# EAGLE board RTK_mosaic-X5-Panel (EAGLE 9.6.2), part 1 of 2
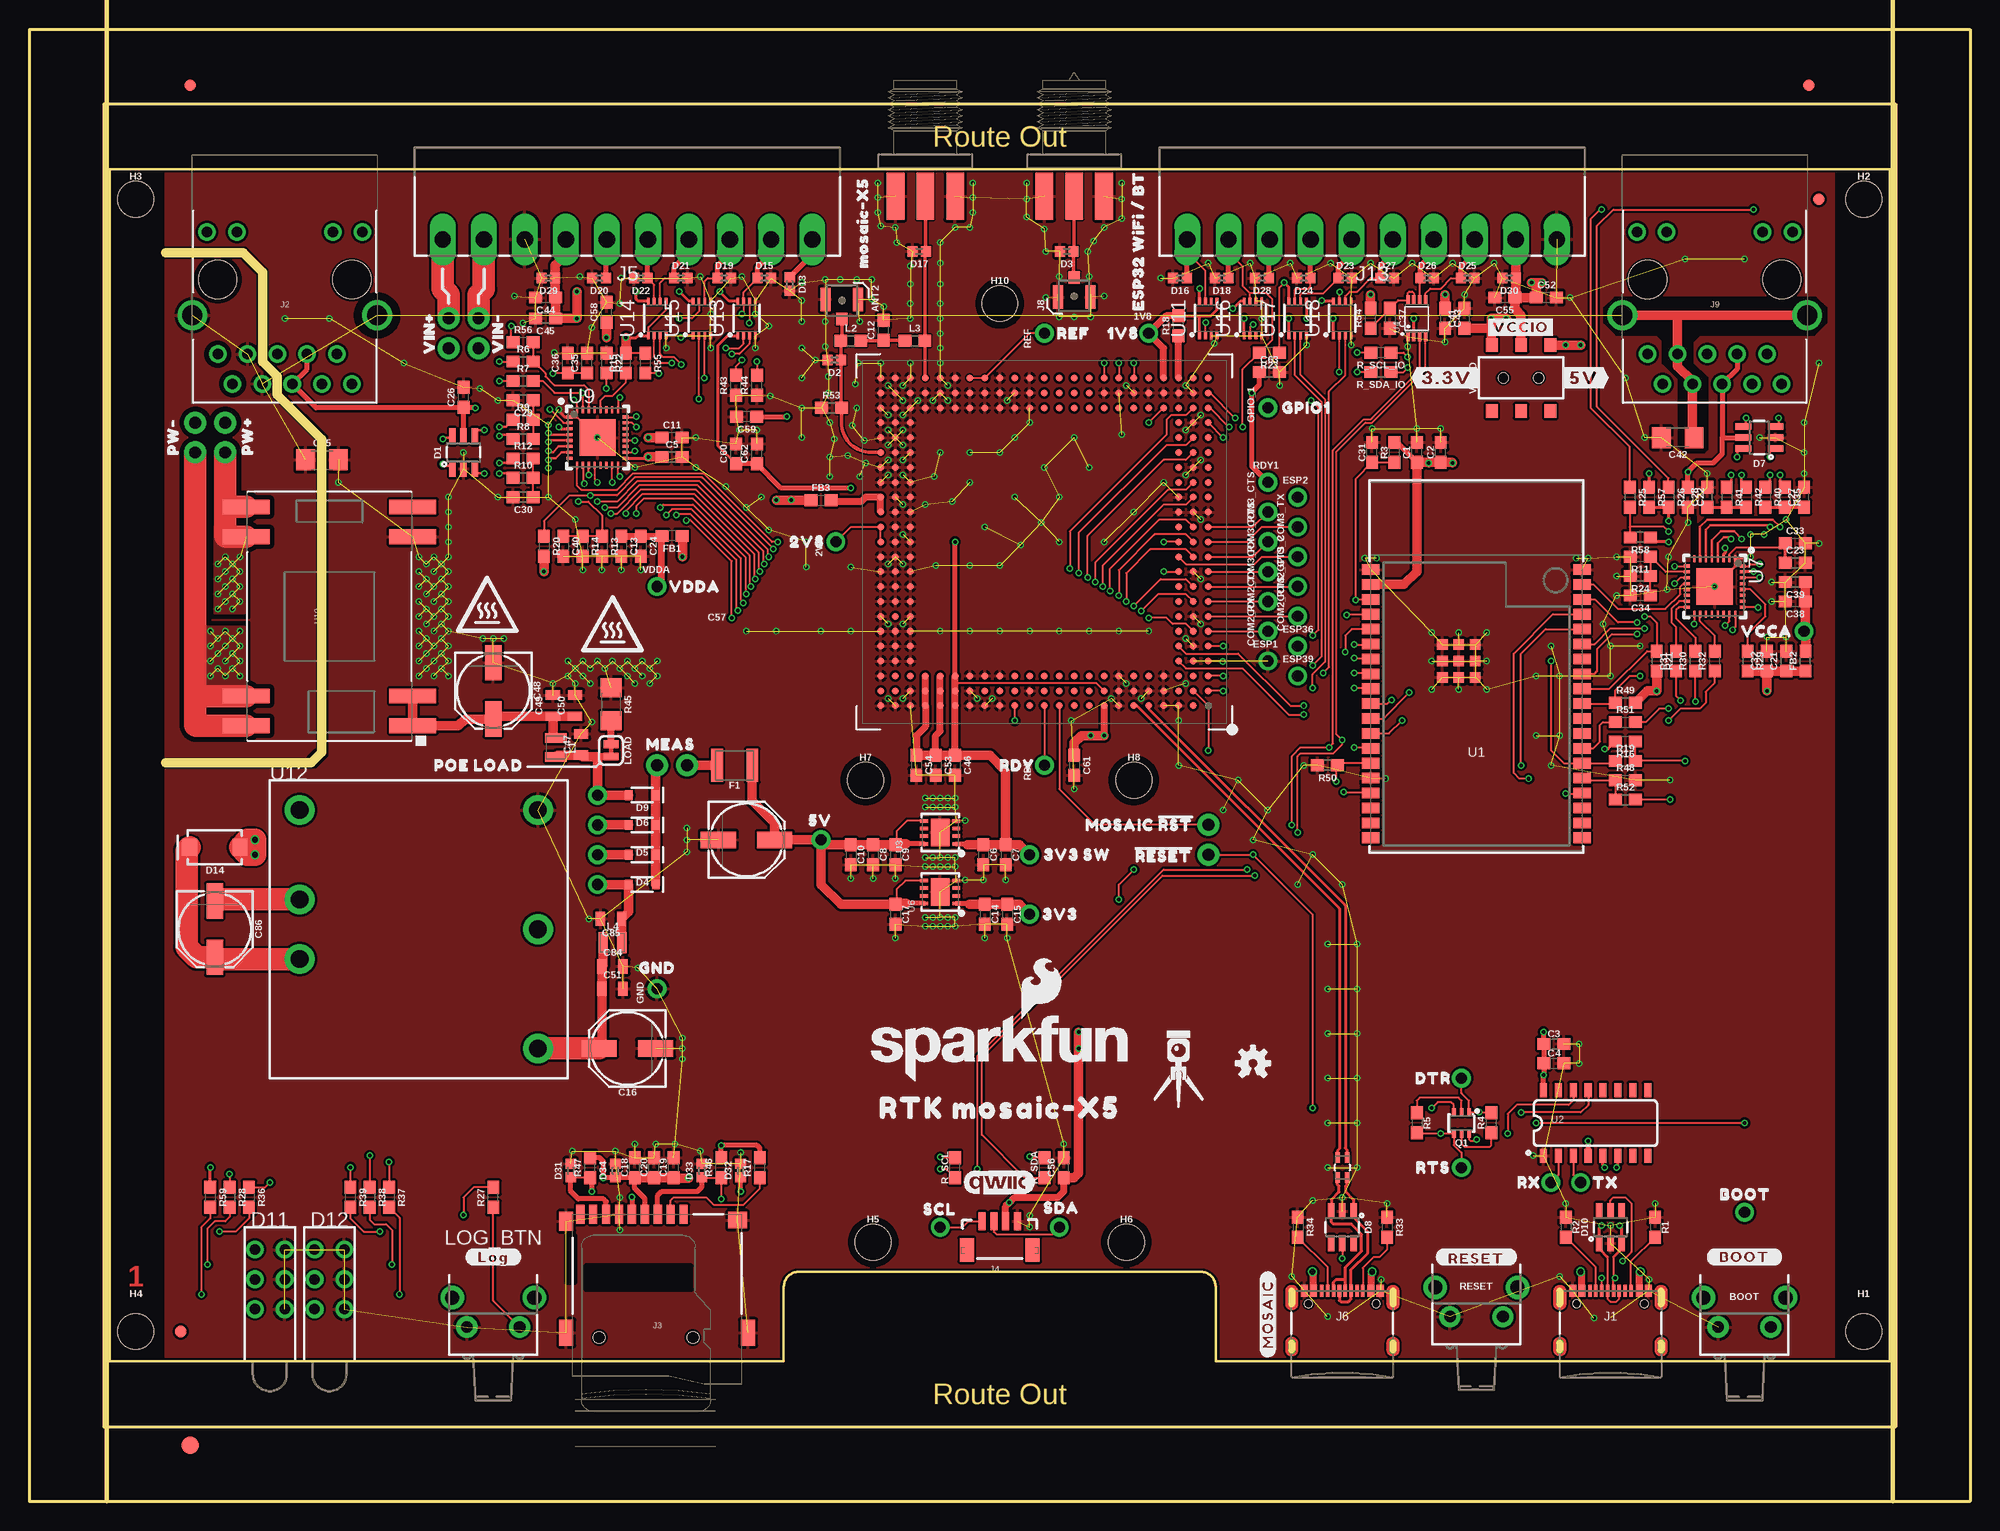
[diagram p0: board, top side]
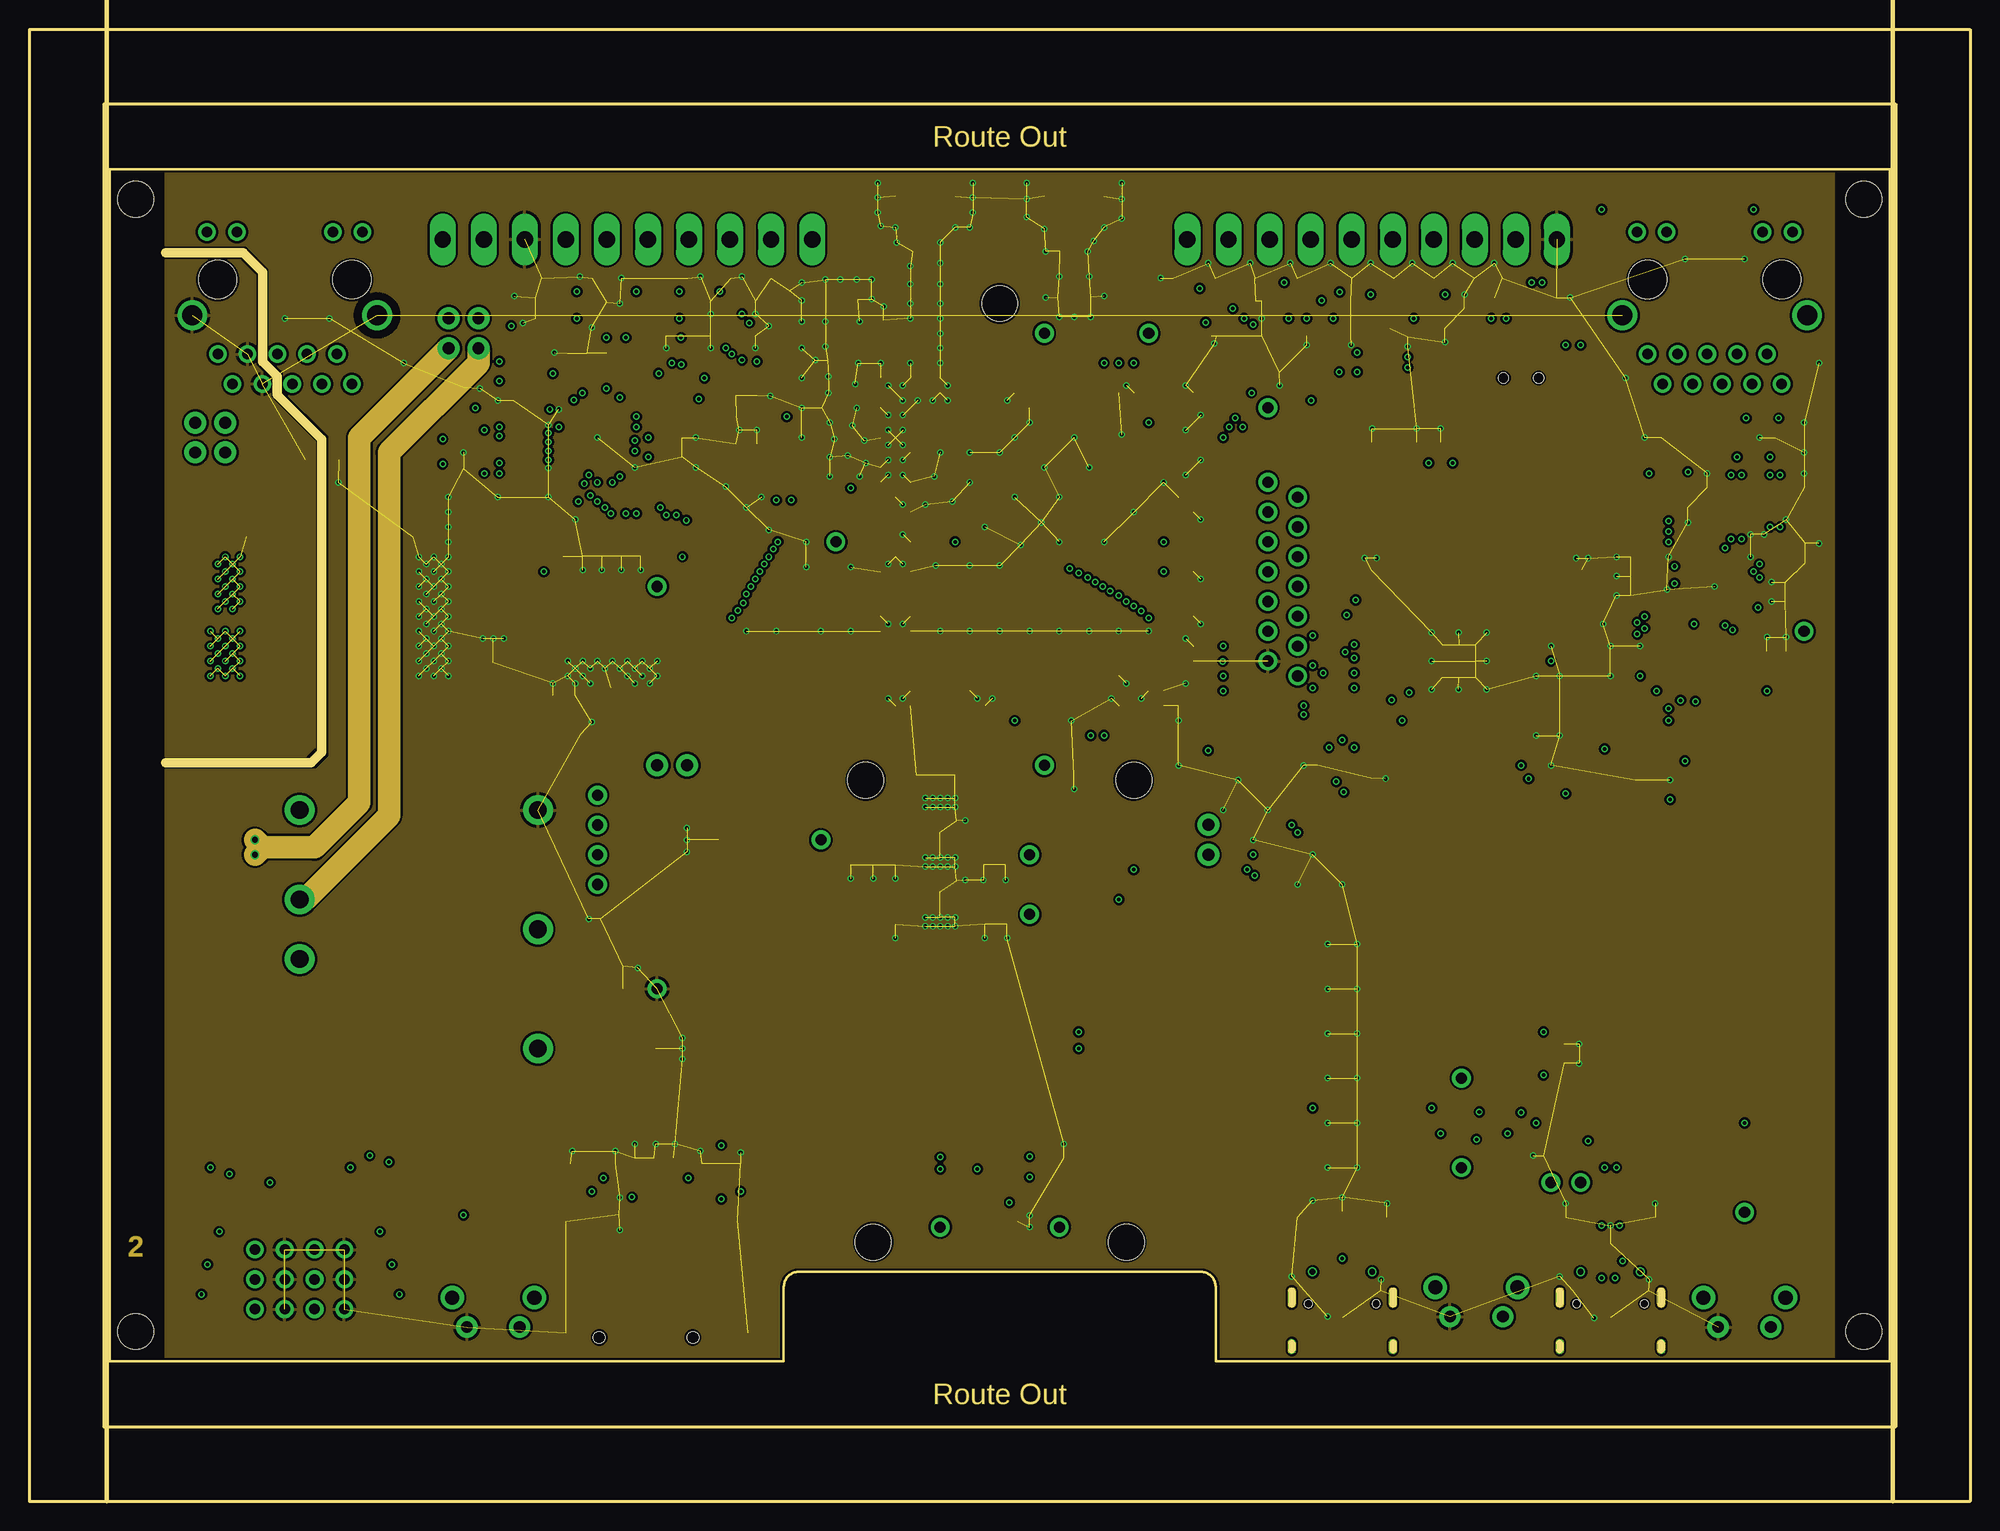
[diagram p1: board, inner layer Route2]
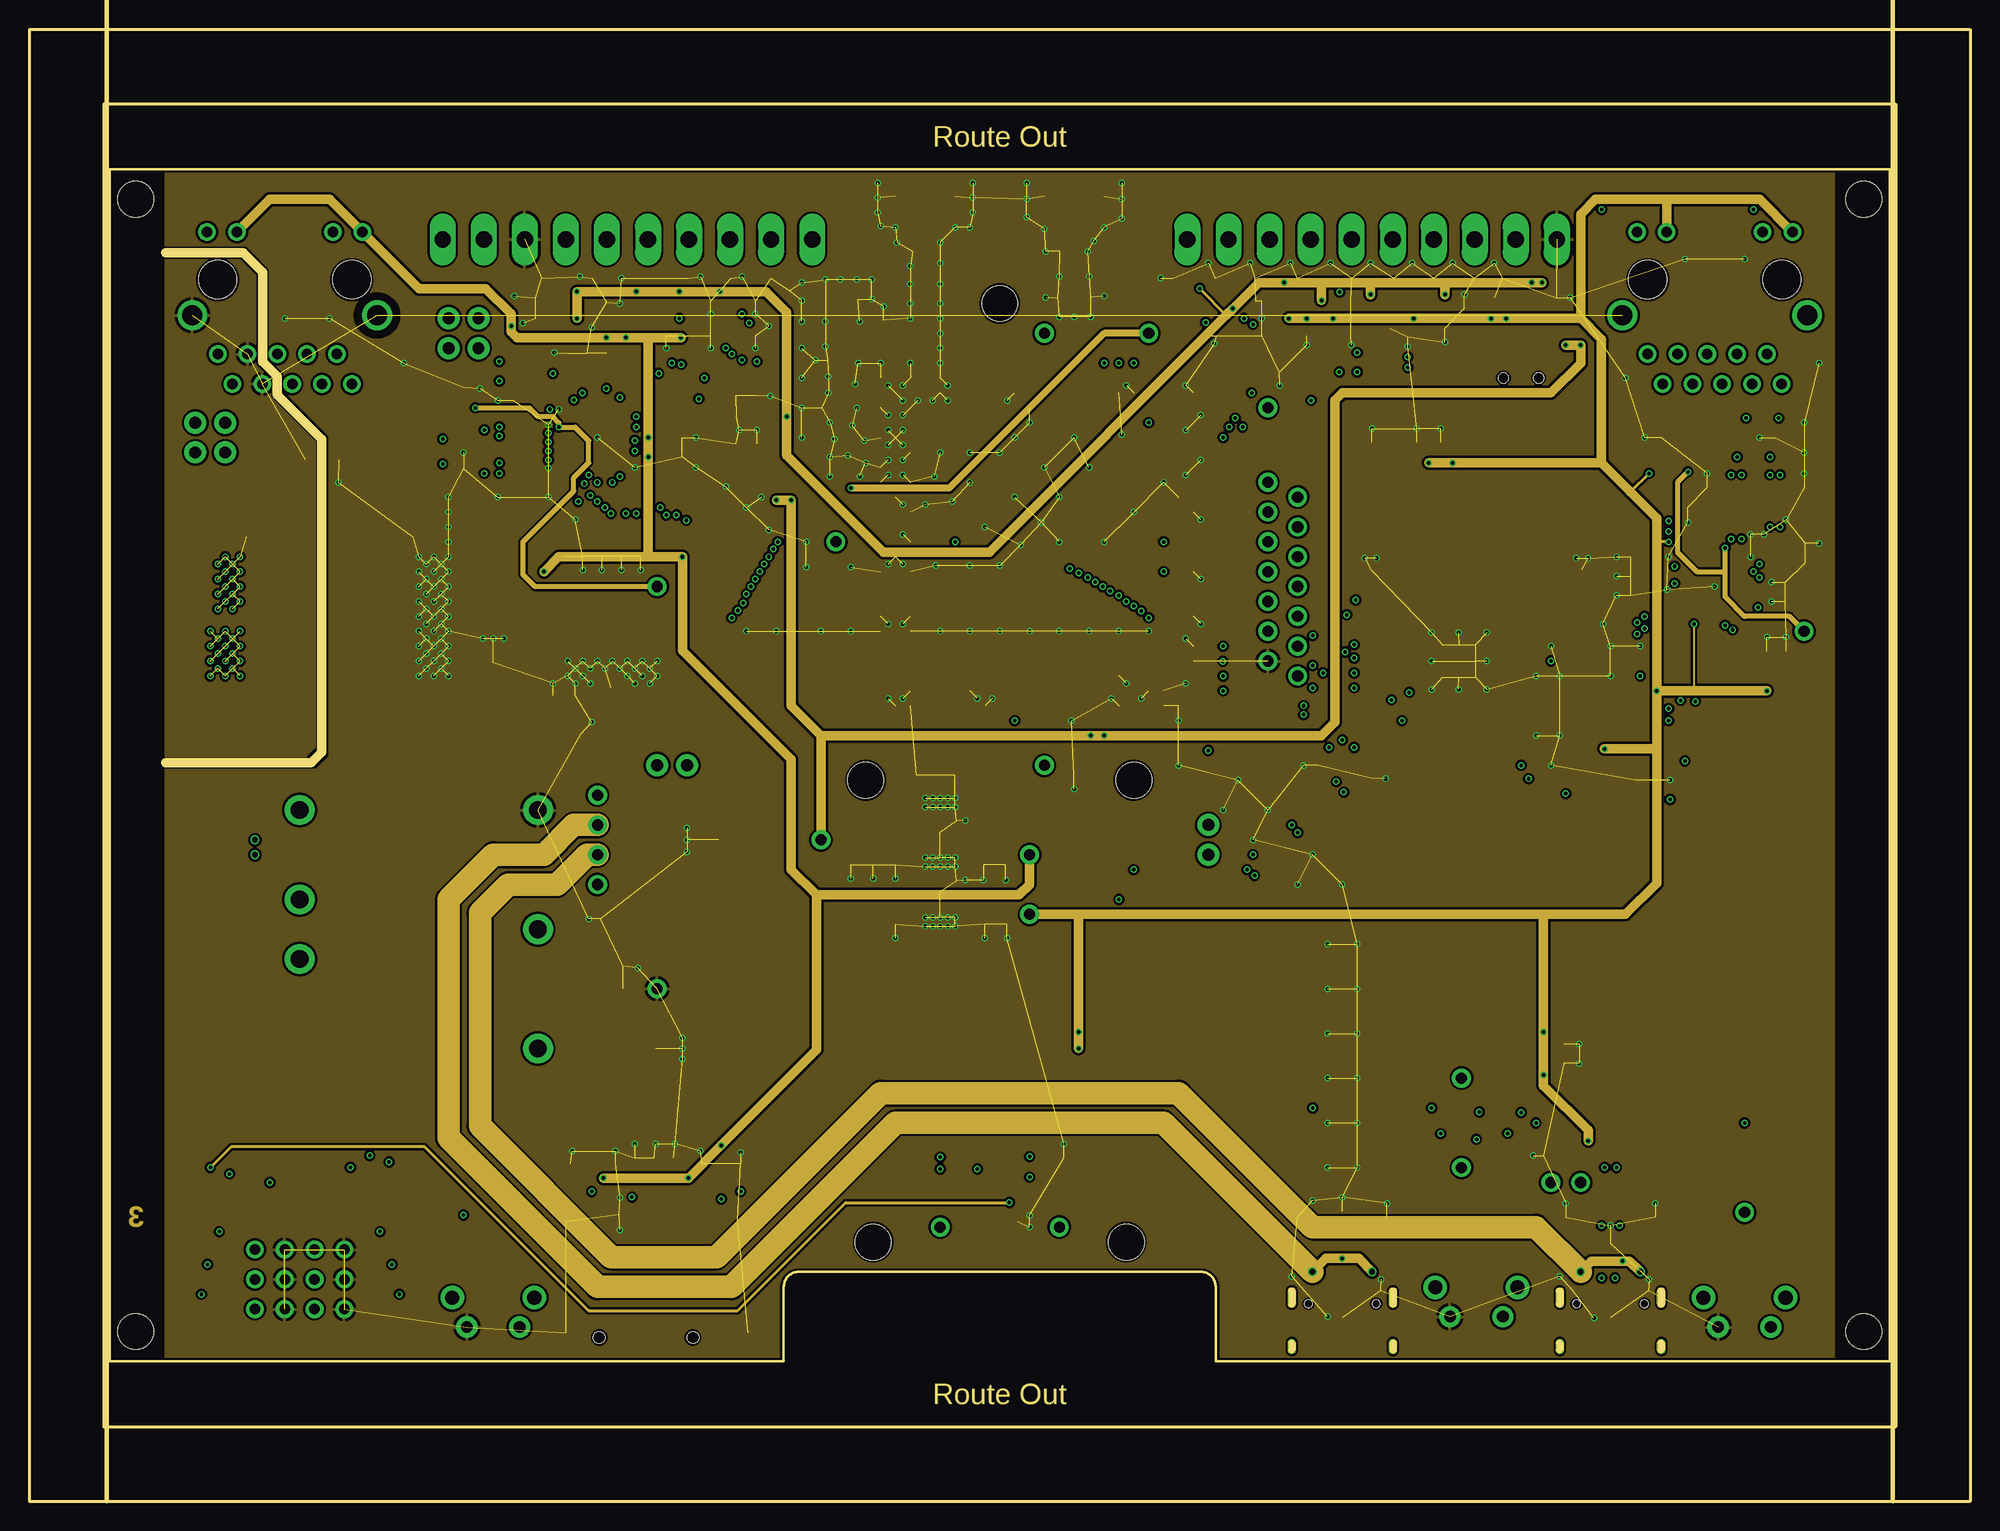
[diagram p2: board, inner layer Route15]
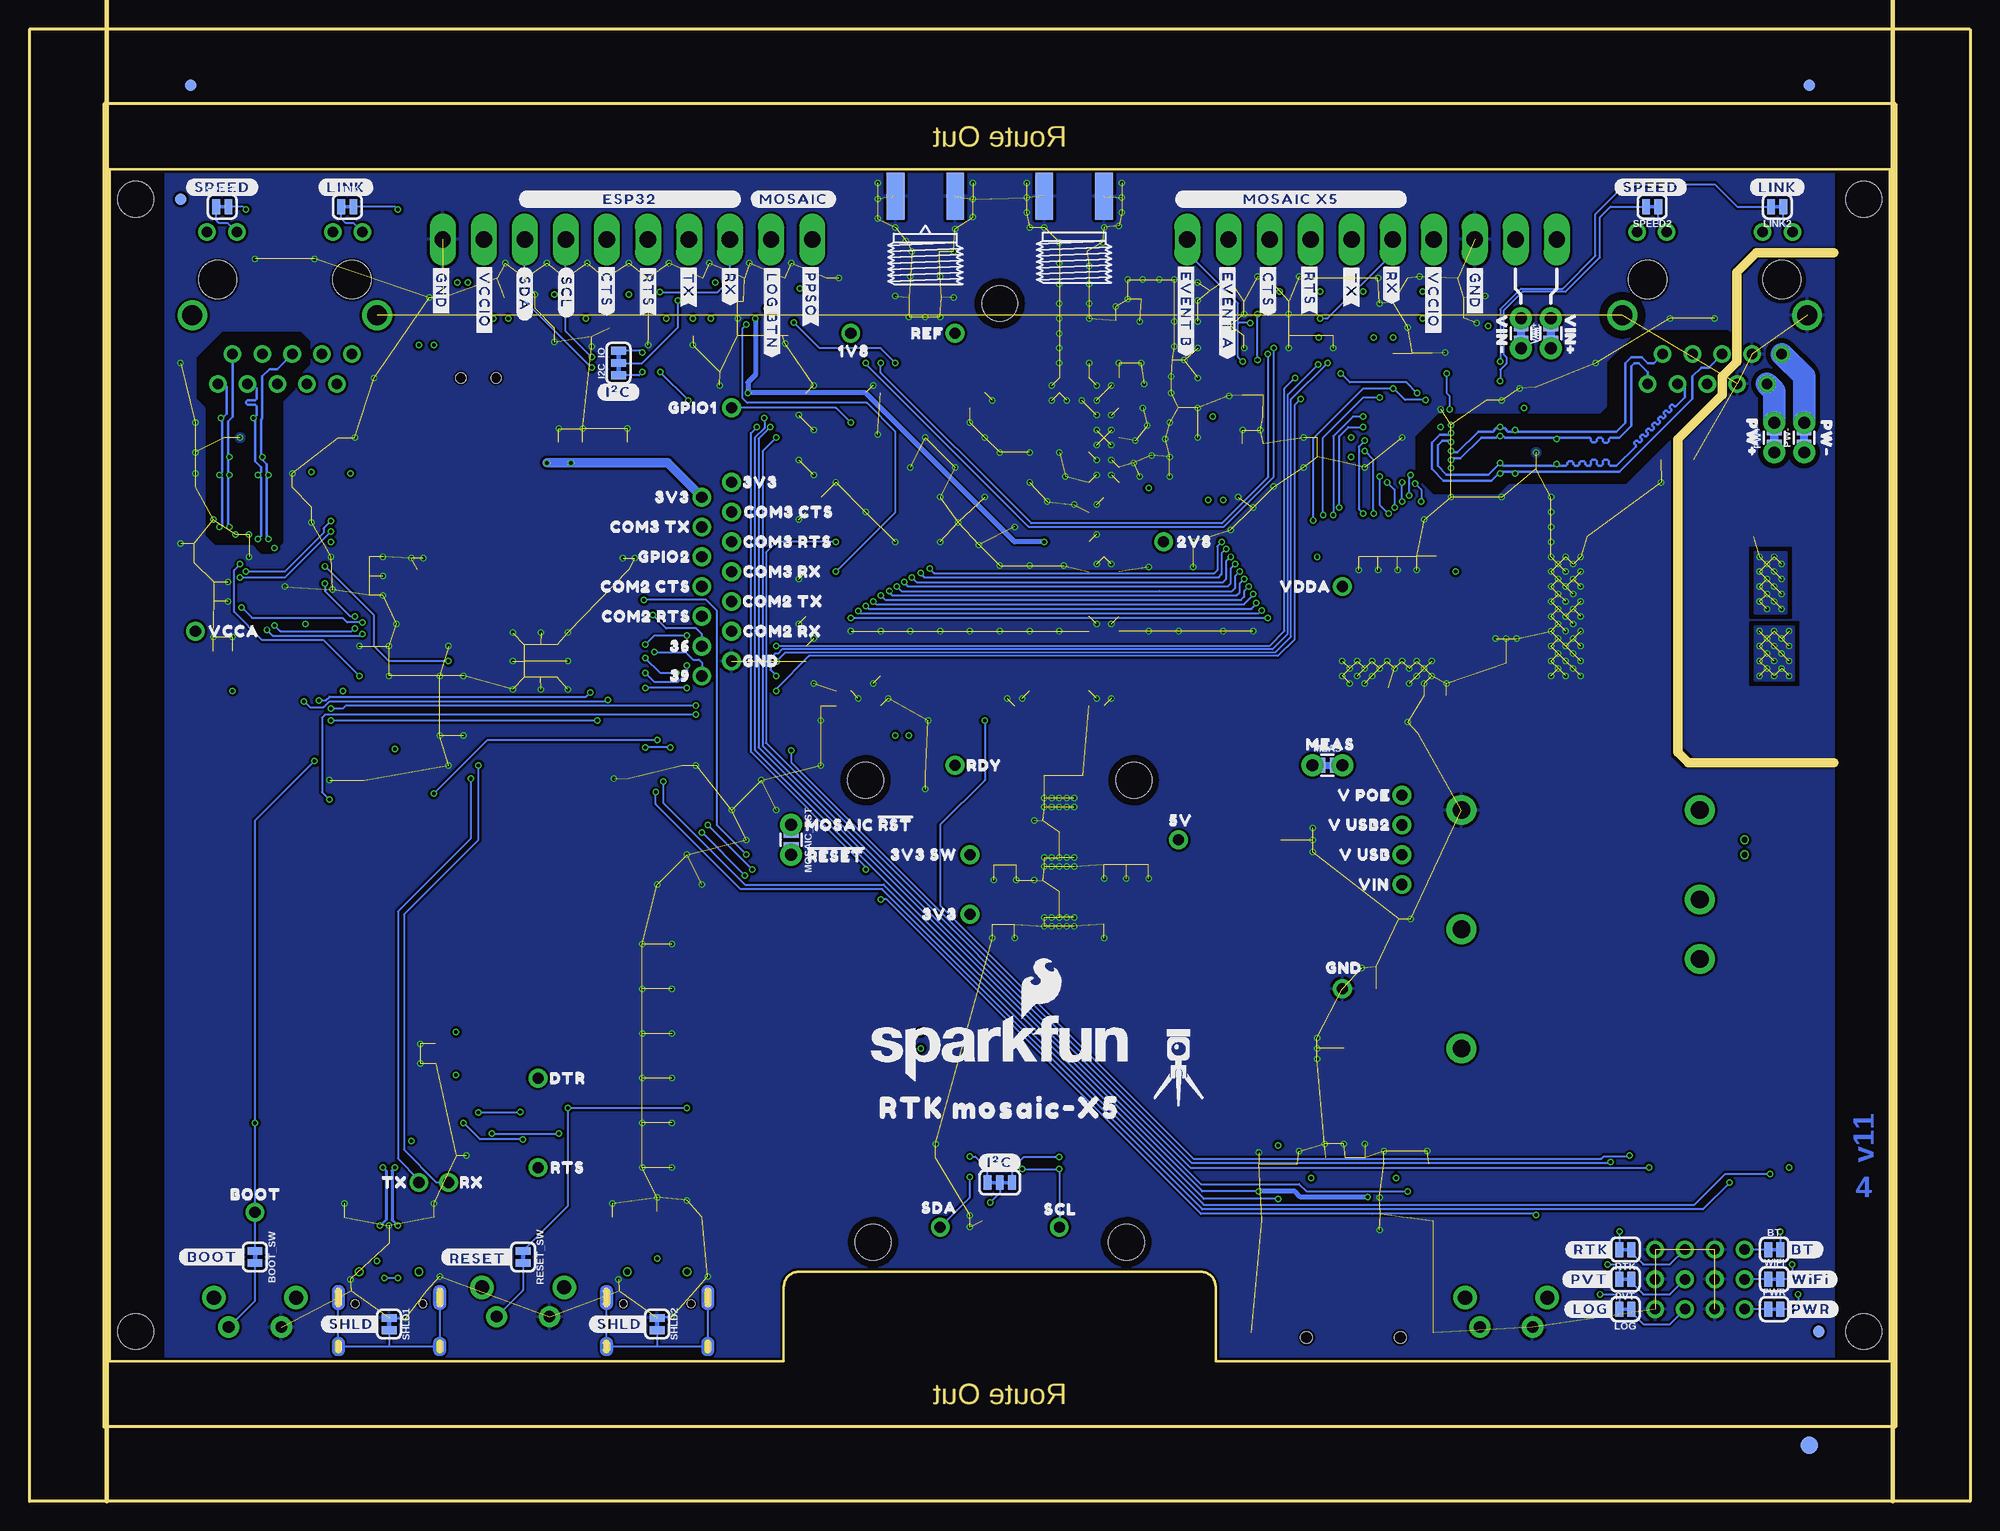
[diagram p3: board, bottom side, seen from below]

Size 165.48 x 125.48 mm. Coordinates in mm from the lower left corner, seen from the top.
Outline: 6.86,11.94 64.33,11.94 64.33,18.29 arc-90 65.59,19.56 99.89,19.56 arc-90 101.16,18.29 101.16,11.94 158.62,11.94 158.62,113.54 6.86,113.54 6.86,11.94
Outline: 0,0 165.48,0 165.48,125.48 0,125.48 0,0
Outline: 6.35,6.35 159.13,6.35 159.13,119.13 6.35,119.13 6.35,6.35
Copper layers (1*2*15*16): Top 0.035559375mm / dielectric 0.47751875mm / Route2 0.035559375mm / dielectric 0.47751875mm / Route15 0.035559375mm / dielectric 0.47751875mm / Bottom 0.035559375mm
Design rules "RTK_mosaic-X5": minimum track width 5mil, minimum drill 0.2mm, track to track 5mil, track to pad 5mil, pad to pad 5mil, via to via 5mil, smd to smd 5mil, copper to edge 7mil, drill to drill 7mil, minimum pad ring 5mil, minimum via ring 5mil, stop-mask expansion 2.5mil, vias tented up to drill 25mil, thermal gap 10mil
tKeepout: area 6.9,18.3 to 11.6,107.2; area 153.9,18.3 to 158.6,107.2
tRestrict: 19 lines
bRestrict: 41 lines
Milling: 11 lines

## Footprints (pad centres in the part's own frame; a part is rotated, then mirrored left to right if it is on the bottom)
1X01_NO_SILK = drill 0.95 pad 1.6: 1 0,0
SMA-EDGE = smd 1.5 x 4: GND@0 -2.54,0; GND@1 2.54,0; SIG 0,0 | smd 1.5 x 4 bottom: GND@2 -2.54,0; GND@3 2.54,0
U.FL_REDUCED_FOOTPRINT__NO_CREAM = smd 2 x 0.85: 1 -0.1,1.375; 2 -0.1,-1.375 | smd 1.05 x 1: FEED 1.575,0
TACTILE_SWITCH_PTH_RA_8-020 = drill 1 pad 1.8: 1 -2.25,0; 2 2.25,0 | drill 1.2 pad 2: M1 -3.5,2.5; M2 3.5,2.5
SMT-JUMPER_2_NC_TRACE_SILK = smd 0.66 x 1.27: 1 -0.521,0; 2 0.521,0
0603 = smd 1.1 x 1: 1 -0.85,0; 2 0.85,0
0603_NO_CREAM = smd 1.1 x 1: 1 -0.85,0; 2 0.85,0
PANASONIC_D = smd 3 x 1.4: + 2.4,0; - -2.4,0
1206 = smd 1.6 x 1.8: 1 -1.4,0; 2 1.4,0
0805 = smd 0.8 x 1.2: 1 -0.9,0; 2 0.9,0
SOT-23-6 = smd 0.55 x 1.35: 1 -0.95,-1.375; 2 0,-1.375; 3 0.95,-1.375; 4 0.95,1.375; 5 0,1.375; 6 -0.95,1.375
0402 = smd 0.85 x 0.9: 1 -0.58,0; 2 0.58,0
SOD-323 = smd 0.63 x 0.83: A 1.15,0; C -1.15,0
CBI_LED_T-3MM_PTH = drill 0.889 pad 1.524: ANODE_1 -1.27,9.525; ANODE_2 -1.27,6.985; ANODE_3 -1.27,4.445; CATHODE_1 1.27,9.525; CATHODE_2 1.27,6.985; CATHODE_3 1.27,4.445
SMA-DIODE = smd 1.27 x 1.47: A -2.15,0; C 2.15,0
FIDUCIAL-1X2 = smd 1 x 1: 1 0,0
FIDUCIAL-1.5X3 = smd 1.5 x 1.5: 1 0,0
RP-SMA-EDGE = smd 1.5 x 4: GND@0 -2.54,0; GND@1 2.54,0; SIG 0,0 | smd 1.5 x 4 bottom: GND@2 -2.54,0; GND@3 2.54,0
1210 = smd 1 x 2.8: 1 -1.5,0; 2 1.5,0
STAND-OFF-TIGHT = hole 3.048: 0,0
SMT-JUMPER_3_2-NC_TRACE_SILK = smd 0.66 x 1.27: 1 -1.041,0; 2 0,0; 3 1.041,0
USB-C-16P_4LAYER-PADS = smd 0.3 x 1: A5 -1.25,-0.34; A6 -0.25,-0.34; A7 0.25,-0.34; A8 1.25,-0.34; B5 1.75,-0.34; B6 0.75,-0.34; B7 -0.75,-0.34; B8 -1.75,-0.34 | smd 0.6 x 1: GND -3.225,-0.34; GND2 3.225,-0.34; VBUS1 -2.45,-0.34; VBUS2 2.45,-0.34 | drill 0.4 pad 0.6 long: SHLD1 -4.318,-0.915; SHLD2 4.318,-0.915; SHLD3 -4.318,-5.095; SHLD4 4.318,-5.095 | hole 0.65: -2.89,-1.445; 2.89,-1.445
MAGJACK-SYM_LED = drill 0.9 pad 1.5: 1 -5.715,8.89; 2 -4.445,6.35; 3 -3.175,8.89; 4 -1.905,6.35; 5 -0.635,8.89; 6 0.635,6.35; 7 1.905,8.89; 8 3.175,6.35; 9 4.445,8.89; 10 5.715,6.35; 11 -6.63,-4.06; 12 -4.09,-4.06; 13 4.09,-4.06; 14 6.63,-4.06 | drill 1.7 pad 2.4: S1 -7.875,3.05; S2 7.875,3.05 | hole 3.25: -5.715,0; 5.715,0
MICROSD-EXTERNALPIN = smd 0.7 x 1.6: 1 2.25,10.5; 2 1.15,10.5; 3 0.05,10.5; 4 -1.05,10.5; 5 -2.15,10.5; 6 -3.25,10.5; 7 -4.35,10.5; 8 -5.45,10.5; 9 -6.55,10.5 | smd 1.2 x 1.6: 10 -7.75,9.9 | smd 1.2 x 2.2: 11 -7.75,0.4; 12 7.75,0.4 | smd 1.6 x 1.4: 13 6.85,10 | hole 1: 3.05,0; -4.95,0
JST04_1MM_VERT = smd 0.6 x 1.55: 1 -1.5,0.775; 2 -0.5,0.775; 3 0.5,0.775; 4 1.5,0.775 | smd 1.2 x 2: NC1 -2.8,3.2; NC2 2.8,3.2
1X10_SCREW_TERMINAL_3.5MM = drill 1.4 pad 2.2 long: 1 -15.75,2.8; 2 -12.25,2.8; 3 -8.75,2.8; 4 -5.25,2.8; 5 -1.75,2.8; 6 1.75,2.8; 7 5.25,2.8; 8 8.75,2.8; 9 12.25,2.8; 10 15.75,2.8
U.FL_REDUCED_FOOTPRINT = smd 2 x 0.85: 1 -0.1,1.375; 2 -0.1,-1.375 | smd 1.05 x 1: FEED 1.575,0
0805-WIDE = smd 0.8 x 1.8: 1 -0.8,0; 2 0.8,0
0603_NO-CREAM = smd 1.1 x 1: 1 -0.85,0; 2 0.85,0
COMBO-JUMPER_2_NC_TRACE = smd 0.635 x 1.27: 1 -0.508,0; 2 0.508,0 | drill 1.016 pad 1.88: 3 -1.27,0; 4 1.27,0
COMBO-JUMPER_2_NO = smd 0.635 x 1.27: 1 -0.508,0; 2 0.508,0 | drill 1.016 pad 1.88: 3 -1.27,0; 4 1.27,0
SC70-6 = smd 0.3 x 0.66: 1 -0.65,-0.92; 2 0,-0.92; 3 0.65,-0.92; 4 0.65,0.92; 5 0,0.92; 6 -0.65,0.92
RFCMF1220100M4T = smd 0.9 x 0.4: A1 -0.85,0.4; A2 0.85,0.4; B1 -0.85,-0.4; B2 0.85,-0.4
ESP32-WROVER-E/IE = smd 0.9 x 1.5: 1 7.8,9; 2 6.53,9; 3 5.26,9; 4 3.99,9; 5 2.72,9; 6 1.45,9; 7 0.18,9; 8 -1.09,9; 9 -2.36,9; 10 -3.63,9; 11 -4.9,9; 12 -6.17,9; 13 -7.44,9; 14 -8.71,9; 15 -9.98,9; 16 -11.25,9; 17 -12.52,9; 18 -13.79,9; 19 -15.06,9; 20 -15.06,-9; 21 -13.79,-9; 22 -12.52,-9; 23 -11.25,-9; 24 -9.98,-9; 25 -8.71,-9; 26 -7.44,-9; 27 -6.17,-9; 28 -4.9,-9; 29 -3.63,-9; 30 -2.36,-9; 31 -1.09,-9; 32 0.18,-9; 33 1.45,-9; 34 2.72,-9; 35 3.99,-9; 36 5.26,-9; 37 6.53,-9; 38 7.8,-9 | smd 0.9 x 0.9: GND 0,1.5; GNDT1 -1.4,2.9; GNDT2 -1.4,1.5; GNDT3 -1.4,0.1; GNDT4 0,0.1; GNDT5 1.4,0.1; GNDT6 1.4,1.5; GNDT7 1.4,2.9; GNDT8 0,2.9
SO016 = smd 0.6 x 1.2: 1 -4.445,-2.8; 2 -3.175,-2.8; 3 -1.905,-2.8; 4 -0.635,-2.8; 5 0.635,-2.8; 6 1.905,-2.8; 7 3.175,-2.8; 8 4.445,-2.8; 9 4.445,2.8; 10 3.175,2.8; 11 1.905,2.8; 12 0.635,2.8; 13 -0.635,2.8; 14 -1.905,2.8; 15 -3.175,2.8; 16 -4.445,2.8
UDFN-8 = smd 0.3 x 0.65: 1 -0.975,-1.375; 2 -0.325,-1.375; 3 0.325,-1.375; 4 0.975,-1.375; 5 0.975,1.375; 6 0.325,1.375; 7 -0.325,1.375; 8 -0.975,1.375 | smd 2.35 x 1.6: EP 0,0
VSSOP_8PIN = smd 0.8 x 0.3: P1 -1.55,0.75; P2 -1.55,0.25; P3 -1.55,-0.25; P4 -1.55,-0.75; P5 1.55,-0.75; P6 1.55,-0.25; P7 1.55,0.25; P8 1.55,0.75
MLF55Q-32LD = smd 0.55 x 0.23: 1 -2.375,1.75; 2 -2.375,1.25; 3 -2.375,0.75; 4 -2.375,0.25; 5 -2.375,-0.25; 6 -2.375,-0.75; 7 -2.375,-1.25; 8 -2.375,-1.75; 17 2.375,-1.75; 18 2.375,-1.25; 19 2.375,-0.75; 20 2.375,-0.25; 21 2.375,0.25; 22 2.375,0.75; 23 2.375,1.25; 24 2.375,1.75 | smd 0.23 x 0.55: 9 -1.75,-2.375; 10 -1.25,-2.375; 11 -0.75,-2.375; 12 -0.25,-2.375; 13 0.25,-2.375; 14 0.75,-2.375; 15 1.25,-2.375; 16 1.75,-2.375; 25 1.75,2.375; 26 1.25,2.375; 27 0.75,2.375; 28 0.25,2.375; 29 -0.25,2.375; 30 -0.75,2.375; 31 -1.25,2.375; 32 -1.75,2.375 | smd 3.1 x 3.1: GND 0,0
MOSAIC_LGA = smd 0.6 x 0.6: A2 13.97,12.7; A3 13.97,11.43; A4 13.97,10.16; A5 13.97,8.89; A6 13.97,7.62; A7 13.97,6.35; A8 13.97,5.08; A9 13.97,3.81; A10 13.97,2.54; A11 13.97,1.27; A12 13.97,0; A13 13.97,-1.27; A14 13.97,-2.54; A15 13.97,-3.81; A16 13.97,-5.08; A17 13.97,-6.35; A18 13.97,-7.62; A19 13.97,-8.89; A20 13.97,-10.16; A21 13.97,-11.43; A22 13.97,-12.7; A23 13.97,-13.97; AA1 -11.43,13.97; AA2 -11.43,12.7; AA3 -11.43,11.43; AA4 -11.43,10.16; AA5 -11.43,8.89; AA6 -11.43,7.62; AA7 -11.43,6.35; AA8 -11.43,5.08; AA9 -11.43,3.81; AA10 -11.43,2.54; AA11 -11.43,1.27; AA12 -11.43,0; AA13 -11.43,-1.27; AA14 -11.43,-2.54; AA15 -11.43,-3.81; AA16 -11.43,-5.08; AA17 -11.43,-6.35; AA18 -11.43,-7.62; AA19 -11.43,-8.89; AA20 -11.43,-10.16; AA21 -11.43,-11.43; AA22 -11.43,-12.7; AA23 -11.43,-13.97; AB1 -12.7,13.97; AB2 -12.7,12.7; AB3 -12.7,11.43; AB4 -12.7,10.16; AB5 -12.7,8.89; AB6 -12.7,7.62; AB7 -12.7,6.35; AB8 -12.7,5.08; AB9 -12.7,3.81; AB10 -12.7,2.54; AB11 -12.7,1.27; AB12 -12.7,0; AB13 -12.7,-1.27; AB14 -12.7,-2.54; AB15 -12.7,-3.81; AB16 -12.7,-5.08; AB17 -12.7,-6.35; AB18 -12.7,-7.62; AB19 -12.7,-8.89; AB20 -12.7,-10.16; AB21 -12.7,-11.43; AB22 -12.7,-12.7; AB23 -12.7,-13.97; AC1 -13.97,13.97; AC2 -13.97,12.7; AC3 -13.97,11.43; AC4 -13.97,10.16; AC5 -13.97,8.89; AC6 -13.97,7.62; AC7 -13.97,6.35; AC8 -13.97,5.08; AC9 -13.97,3.81; AC10 -13.97,2.54; AC11 -13.97,1.27; AC12 -13.97,0; AC13 -13.97,-1.27; AC14 -13.97,-2.54; AC15 -13.97,-3.81; AC16 -13.97,-5.08; AC17 -13.97,-6.35; AC18 -13.97,-7.62; AC19 -13.97,-8.89; AC20 -13.97,-10.16; AC21 -13.97,-11.43; AC22 -13.97,-12.7; AC23 -13.97,-13.97; B1 12.7,13.97; B2 12.7,12.7; B3 12.7,11.43; B4 12.7,10.16; B5 12.7,8.89; B6 12.7,7.62; B7 12.7,6.35; B8 12.7,5.08; B9 12.7,3.81; B10 12.7,2.54; B11 12.7,1.27; B12 12.7,0; B13 12.7,-1.27; B14 12.7,-2.54; B15 12.7,-3.81; B16 12.7,-5.08; B17 12.7,-6.35; B18 12.7,-7.62; B19 12.7,-8.89; B20 12.7,-10.16; B21 12.7,-11.43; B22 12.7,-12.7; B23 12.7,-13.97; C1 11.43,13.97; C2 11.43,12.7; C3 11.43,11.43; C4 11.43,10.16; C5 11.43,8.89; C6 11.43,7.62; C7 11.43,6.35; C8 11.43,5.08; C9 11.43,3.81; C10 11.43,2.54; C11 11.43,1.27; C12 11.43,0; C13 11.43,-1.27; C14 11.43,-2.54; C15 11.43,-3.81; C16 11.43,-5.08; C17 11.43,-6.35; C18 11.43,-7.62; C19 11.43,-8.89; C20 11.43,-10.16; C21 11.43,-11.43; C22 11.43,-12.7; C23 11.43,-13.97; D1 10.16,13.97; D2 10.16,12.7; D3 10.16,11.43; D21 10.16,-11.43; D22 10.16,-12.7; D23 10.16,-13.97; E1 8.89,13.97; E2 8.89,12.7; E3 8.89,11.43; E21 8.89,-11.43; E22 8.89,-12.7; E23 8.89,-13.97; F1 7.62,13.97; F2 7.62,12.7; F3 7.62,11.43; F21 7.62,-11.43; F22 7.62,-12.7; F23 7.62,-13.97; G1 6.35,13.97; G2 6.35,12.7; G3 6.35,11.43; G21 6.35,-11.43; G22 6.35,-12.7; G23 6.35,-13.97; H1 5.08,13.97; H2 5.08,12.7; H3 5.08,11.43; H21 5.08,-11.43; H22 5.08,-12.7; H23 5.08,-13.97; J1 3.81,13.97; J2 3.81,12.7; J3 3.81,11.43; J21 3.81,-11.43; J22 3.81,-12.7; J23 3.81,-13.97; K1 2.54,13.97; K2 2.54,12.7; K3 2.54,11.43; K21 2.54,-11.43; K22 2.54,-12.7; K23 2.54,-13.97; L1 1.27,13.97; L2 1.27,12.7; L3 1.27,11.43; L21 1.27,-11.43; L22 1.27,-12.7; L23 1.27,-13.97; M1 0,13.97; M2 0,12.7; M3 0,11.43; M21 0,-11.43; M22 0,-12.7; M23 0,-13.97; N1 -1.27,13.97; N2 -1.27,12.7; N3 -1.27,11.43; N21 -1.27,-11.43; N22 -1.27,-12.7; N23 -1.27,-13.97; P1 -2.54,13.97; P2 -2.54,12.7; P3 -2.54,11.43; P21 -2.54,-11.43; P22 -2.54,-12.7; P23 -2.54,-13.97; R1 -3.81,13.97; R2 -3.81,12.7; R3 -3.81,11.43; R21 -3.81,-11.43; R22 -3.81,-12.7; R23 -3.81,-13.97; T1 -5.08,13.97; T2 -5.08,12.7; T3 -5.08,11.43; T21 -5.08,-11.43; T22 -5.08,-12.7; T23 -5.08,-13.97; U1 -6.35,13.97; U2 -6.35,12.7; U3 -6.35,11.43; U21 -6.35,-11.43; U22 -6.35,-12.7; U23 -6.35,-13.97; V1 -7.62,13.97; V2 -7.62,12.7; V3 -7.62,11.43; V21 -7.62,-11.43; V22 -7.62,-12.7; V23 -7.62,-13.97; W1 -8.89,13.97; W2 -8.89,12.7; W3 -8.89,11.43; W21 -8.89,-11.43; W22 -8.89,-12.7; W23 -8.89,-13.97; Y1 -10.16,13.97; Y2 -10.16,12.7; Y3 -10.16,11.43; Y21 -10.16,-11.43; Y22 -10.16,-12.7; Y23 -10.16,-13.97
DP990X = smd 1.25 x 4: 1 -9.33,-7.1; 2 -6.79,-7.1; 3 6.79,-7.1; 4 9.33,-7.1; 5 9.33,7.1; 6 6.79,7.1; 7 -6.79,7.1; 8 -9.33,7.1
VSSOP8_(SOT765-1) = smd 0.55 x 0.3: 1 -1.475,0.75; 2 -1.475,0.25; 3 -1.475,-0.25; 4 -1.475,-0.75; 5 1.475,-0.75; 6 1.475,-0.25; 7 1.475,0.25; 8 1.475,0.75
URB_YMD-15WR3 = drill 1.499 pad 2.54: 1 -10.16,10.16; 2 -10.16,2.54; 3 -10.16,-2.54; 4 10.16,-10.16; 5 10.16,0; 6 10.16,10.16
SWITCH_DPDT_SMD_AYZ0202 = smd 1 x 1.15: 1 -2.5,2.825; 2 0,2.825; 3 2.5,2.825; 4 -2.5,-2.825; 5 0,-2.825; 6 2.5,-2.825 | hole 0.85: 1.5,0; -1.5,0

## Placement (x,y rotation side)
1V8  TEST-POINTPOGO_PTH  [1X01_NO_SILK]  95.44,99.57 0 top
2V8  TEST-POINTPOGO_PTH  [1X01_NO_SILK]  68.77,81.79 90 top
3V3  TEST-POINTPOGO_PTH  [1X01_NO_SILK]  85.28,50.04 0 top
3V3_SW  TEST-POINTPOGO_PTH  [1X01_NO_SILK]  85.28,55.12 0 top
5V  TEST-POINTPOGO_PTH  [1X01_NO_SILK]  67.5,56.39 0 top
ANT1  ANTENNA-SMA-GROUNDEDEDGE_SMA  [SMA-EDGE]  76.39,111.25 0 top
ANT2  DNP  [U.FL_REDUCED_FOOTPRINT__NO_CREAM]  69.28,102.36 270 top
BOOT  MOMENTARY-SWITCH-SPST-PTH-RIGHT-ANGLE-8-020  [TACTILE_SWITCH_PTH_RA_8-020]  146.24,14.86 0 top
BOOT_SW  JUMPER-SMT_2_NC_TRACE_SILK  [SMT-JUMPER_2_NC_TRACE_SILK]  146.24,20.83 270 bottom
BT  JUMPER-SMT_2_NC_TRACE_SILK  [SMT-JUMPER_2_NC_TRACE_SILK]  16.7,21.46 0 bottom
C1  2.2uF  [0603]  118.3,89.41 90 top
C2  0.1uF  [0603]  120.33,89.41 90 top
C3  2.2uF  [0603]  129.98,38.99 0 top
C4  10nF  [0603]  129.98,37.34 0 top
C5  0.1uF  [0603]  54.8,89.03 0 top
C6  2.2uF  [0603]  81.34,55.12 270 top
C7  0.1uF  [0603]  83.25,55.12 270 top
C8  2.2uF  [0603]  71.95,55.12 270 top
C9  2.2uF  [0603]  73.85,55.12 270 top
C10  2.2uF  [0603]  70.04,55.12 270 top
C11  10uF  [0603]  54.8,90.68 0 top
C12  DNP  [0603_NO_CREAM]  72.83,99.82 90 top
C13  0.1uF  [0603]  50.48,81.41 270 top
C14  2.2uF  [0603]  81.47,50.04 270 top
C15  0.1uF  [0603]  83.38,50.04 270 top
C16  100uF  [PANASONIC_D]  50.99,38.61 180 top
C17  0.1uF  [0603]  73.85,50.04 270 top
C18  2.2uF  [0603]  51.63,28.45 90 top
C19  0.1uF  [0603]  54.93,28.45 90 top
C20  10uF  [0603]  53.28,28.45 90 top
C21  0.1uF  [0603]  149.8,71.63 90 top
C22  0.1uF  [0603]  141.41,85.6 270 top
C23  0.1uF  [0603]  150.56,80.01 0 top
C24  10uF  [0603]  52.13,81.41 270 top
C25  1nF  [1206]  24.96,88.77 0 top
C26  0.1uF  [0603]  37.02,94.11 90 top
C27  0.1uF  [0603]  151.32,85.6 90 top
C28  0.1uF  [0603]  143.07,85.6 90 top
C29  0.1uF  [0603]  42.1,93.85 180 top
C30  0.1uF  [0603]  42.1,85.6 180 top
C31  0.1uF  [0603]  114.49,89.41 90 top
C32  10uF  [0603]  148.15,71.63 90 top
C33  2.2uF  [0603]  150.56,81.66 0 top
C34  100pF  [0603]  137.35,77.22 180 top
C35  0.1uF  [0603]  47.56,97.03 90 top
C36  2.2uF  [0603]  45.91,97.03 90 top
C37  0.1uF  [0603]  116.01,100.84 270 top
C38  0.1uF  [0603]  150.56,76.71 180 top
C39  10uF  [0603]  150.56,78.36 180 top
C40  100pF  [0603]  45.53,81.41 270 top
C41  0.1uF  [0603]  122.36,100.84 90 top
C42  1nF  [1206]  140.54,90.68 180 top
C43  0.1uF  [0603]  120.71,100.84 270 top
C44  0.1uF  [0603]  44.01,102.62 180 top
C45  10uF  [0603]  44.01,100.84 180 top
C46  2.2uF  [0603]  78.93,62.74 270 top
C47  10uF  [0805]  47.05,64.52 90 top
C48  100uF  [PANASONIC_D]  39.56,69.09 270 top
C49  10uF  [0805]  44.64,67.82 90 top
C50  10uF  [0805]  46.55,67.82 90 top
C51  10uF  [0805]  49.72,43.69 0 top
C52  0.1uF  [0603]  129.35,102.62 0 top
C53  0.1uF  [0603]  77.28,62.74 270 top
C54  10uF  [0603]  75.63,62.74 270 top
C55  10uF  [0603]  125.79,102.62 180 top
C56  2.2uF  [0603]  88.2,28.45 90 top
C57  100uF  [PANASONIC_D]  61.15,56.39 0 top
C58  0.1uF  [0603]  49.21,101.35 90 top
C59  0.1uF  [0603]  61.15,92.46 180 top
C60  2.2uF  [0603]  60.26,89.28 90 top
C61  2.2uF  [0603]  89.09,62.74 270 top
C62  0.1uF  [0603]  62.04,89.28 90 top
C63  0.1uF  [0603]  105.73,96.27 0 top
C84  10uF  [0805]  49.72,45.59 0 top
C85  10uF  [0805]  49.59,49.66 180 top
C86  47UF  [PANASONIC_D]  15.81,48.77 270 top
COM2_CTS  TEST-POINTPOGO_PTH  [1X01_NO_SILK]  108.14,77.98 90 top
COM2_RTS  TEST-POINTPOGO_PTH  [1X01_NO_SILK]  108.14,75.44 90 top
COM2_RX  TEST-POINTPOGO_PTH  [1X01_NO_SILK]  105.6,74.17 90 top
COM2_TX  TEST-POINTPOGO_PTH  [1X01_NO_SILK]  105.6,76.71 90 top
COM3_CTS  TEST-POINTPOGO_PTH  [1X01_NO_SILK]  105.6,84.33 90 top
COM3_RTS  TEST-POINTPOGO_PTH  [1X01_NO_SILK]  105.6,81.79 90 top
COM3_RX  TEST-POINTPOGO_PTH  [1X01_NO_SILK]  105.6,79.25 90 top
COM3_TX  TEST-POINTPOGO_PTH  [1X01_NO_SILK]  108.14,83.06 90 top
D1  ESD Diode  [SOT-23-6]  37.02,89.41 0 top
D2  PESD0402  [0402]  68.64,97.28 180 top
D3  PESD0402  [0402]  88.46,106.55 180 top
D4  3A/10V/280mV  [SOD-323]  52.26,52.58 180 top
D5  3A/10V/280mV  [SOD-323]  52.26,55.12 180 top
D6  3A/10V/280mV  [SOD-323]  52.26,57.66 180 top
D7  ESD Diode  [SOT-23-6]  147.51,90.68 90 top
D8  ESD Diode  [SOT-23-6]  111.95,23.37 180 top
D9  3A/10V/280mV  [SOD-323]  52.26,60.2 180 top
D10  ESD Diode  [SOT-23-6]  134.81,23.37 0 top
D11  Yellow Green Red  [CBI_LED_T-3MM_PTH]  20.51,11.94 0 top
D12  Yellow Green Red  [CBI_LED_T-3MM_PTH]  25.59,11.94 0 top
D13  PESD0402  [0402]  64.83,103.76 270 top
D14  3A/40V  [SMA-DIODE]  15.81,55.75 180 top
D15  PESD0402  [0402]  62.67,104.27 0 top
D16  PESD0402  [0402]  98.11,104.27 180 top
D17  PESD0402  [0402]  75.88,106.55 180 top
D18  PESD0402  [0402]  101.66,104.27 180 top
D19  PESD0402  [0402]  59.25,104.27 0 top
D20  PESD0402  [0402]  48.58,104.27 180 top
D21  PESD0402  [0402]  55.56,104.27 0 top
D22  PESD0402  [0402]  52.13,104.27 180 top
D23  PESD0402  [0402]  112.2,104.27 0 top
D24  PESD0402  [0402]  108.65,104.27 180 top
D25  PESD0402  [0402]  122.62,104.27 0 top
D26  PESD0402  [0402]  119.19,104.27 0 top
D27  PESD0402  [0402]  115.76,104.27 0 top
D28  PESD0402  [0402]  105.09,104.27 180 top
D29  PESD0402  [0402]  44.26,104.27 180 top
D30  PESD0402  [0402]  126.17,104.27 180 top
D31  PESD0402  [0402]  46.16,28.19 90 top
D32  PESD0402  [0402]  60.64,28.19 90 top
D33  PESD0402  [0402]  57.34,28.19 90 top
D34  PESD0402  [0402]  49.97,28.19 90 top
DTR  TEST-POINTPOGO_PTH  [1X01_NO_SILK]  122.11,36.07 0 top
E$1  [FIDUCIAL-1X2]  13.72,120.71 0 top
E$2  [FIDUCIAL-1X2]  13.72,120.71 0 bottom
E$3  [FIDUCIAL-1X2]  151.7,120.71 0 top
E$4  [FIDUCIAL-1X2]  151.7,120.71 0 bottom
E$5  [FIDUCIAL-1.5X3]  13.72,4.76 0 top
E$6  [FIDUCIAL-1.5X3]  13.72,4.76 0 bottom
ESP1  TEST-POINTPOGO_PTH  [1X01_NO_SILK]  105.6,71.63 0 top
ESP2  TEST-POINTPOGO_PTH  [1X01_NO_SILK]  108.14,85.6 0 top
ESP32_RF  ANTENNA-SMA-GROUNDEDEDGE_RPSMA  [RP-SMA-EDGE]  89.09,111.25 0 top
ESP36  TEST-POINTPOGO_PTH  [1X01_NO_SILK]  108.14,72.9 0 top
ESP39  TEST-POINTPOGO_PTH  [1X01_NO_SILK]  108.14,70.36 0 top
F1  6V/2A  [1210]  60.13,62.74 180 top
FB1  470Ω  [0603]  54.8,82.3 180 top
FB2  470Ω  [0603]  151.45,71.63 90 top
FB3  470Ω  [0603]  67.5,85.34 0 top
FD1  FIDUCIAL1X2  [FIDUCIAL-1X2]  12.89,14.48 0 bottom
FD2  FIDUCIAL1X2  [FIDUCIAL-1X2]  12.89,14.48 0 top
FD3  FIDUCIAL1X2  [FIDUCIAL-1X2]  152.59,111 0 bottom
FD4  FIDUCIAL1X2  [FIDUCIAL-1X2]  152.59,111 0 top
GND  TEST-POINTPOGO_PTH  [1X01_NO_SILK]  53.53,43.69 90 top
GPIO_1  TEST-POINTPOGO_PTH  [1X01_NO_SILK]  105.6,93.22 90 top
GPIO_2  TEST-POINTPOGO_PTH  [1X01_NO_SILK]  108.14,80.52 90 top
H1  STAND-OFFTIGHT  [STAND-OFF-TIGHT]  156.4,14.48 0 top
H2  STAND-OFFTIGHT  [STAND-OFF-TIGHT]  156.4,111 0 top
H3  STAND-OFFTIGHT  [STAND-OFF-TIGHT]  9.08,111 0 top
H4  STAND-OFFTIGHT  [STAND-OFF-TIGHT]  9.08,14.48 0 top
H5  STAND-OFFTIGHT  [STAND-OFF-TIGHT]  71.95,22.1 0 top
H6  STAND-OFFTIGHT  [STAND-OFF-TIGHT]  93.54,22.1 0 top
H7  STAND-OFFTIGHT  [STAND-OFF-TIGHT]  71.31,61.47 0 top
H8  STAND-OFFTIGHT  [STAND-OFF-TIGHT]  94.17,61.47 0 top
H10  STAND-OFFTIGHT  [STAND-OFF-TIGHT]  82.74,102.11 0 top
I2C  JUMPER-SMT_3_2-NC_TRACE_SILK  [SMT-JUMPER_3_2-NC_TRACE_SILK]  82.74,27.18 0 bottom
I2C_IO  JUMPER-SMT_3_2-NC_TRACE_SILK  [SMT-JUMPER_3_2-NC_TRACE_SILK]  115.25,97.03 90 bottom
J1  [USB-C-16P_4LAYER-PADS]  134.81,18.29 0 top
J2  MAGJACK-POE  [MAGJACK-SYM_LED]  21.78,104.14 180 top
J3  MICRO-SD-PUSH-PUSH-EXT-PIN  [MICROSD-EXTERNALPIN]  53.53,13.97 0 top
J4  Vertical Qwiic Connector  [JST04_1MM_VERT]  82.74,24.64 180 top
J5  [1X10_SCREW_TERMINAL_3.5MM]  50.99,110.36 180 top
J6  [USB-C-16P_4LAYER-PADS]  111.95,18.29 0 top
J8  [U.FL_REDUCED_FOOTPRINT]  89.09,102.74 90 top
J9  MAGJACK-POE  [MAGJACK-SYM_LED]  143.7,104.14 180 top
J13  [1X10_SCREW_TERMINAL_3.5MM]  114.49,110.36 180 top
L1  2.2uH  [0805-WIDE]  44.89,64.26 270 top
L2  DNP  [0603_NO-CREAM]  70.04,98.93 0 top
L3  DNP  [0603_NO-CREAM]  75.5,98.93 0 top
L4  2.2uH  [0805-WIDE]  49.72,47.62 0 top
LINK  JUMPER-SMT_2_NC_TRACE_SILK  [SMT-JUMPER_2_NC_TRACE_SILK]  138.37,110.36 0 bottom
LINK2  JUMPER-SMT_2_NC_TRACE_SILK  [SMT-JUMPER_2_NC_TRACE_SILK]  16.45,110.36 180 bottom
LOAD  JUMPER-SMT_2_NC_TRACE_SILK  [SMT-JUMPER_2_NC_TRACE_SILK]  49.59,64.01 270 top
LOG  JUMPER-SMT_2_NC_TRACE_SILK  [SMT-JUMPER_2_NC_TRACE_SILK]  29.4,16.38 180 bottom
LOG_BTN  MOMENTARY-SWITCH-SPST-PTH-RIGHT-ANGLE-8-020  [TACTILE_SWITCH_PTH_RA_8-020]  39.56,14.86 0 top
LOGO2  QWIIC_LOGO_6MM  [QWIIC_6MM]  82.74,27.18 0 top
LOGO4  OSHW-LOGOS  [OSHW-LOGO-S]  104.33,37.34 0 top
LOGO5  SFE_LOGO_NAME.2_INCH  [SFE_LOGO_NAME_.2]  82.74,38.61 0 top
LOGO6  SFE_LOGO_FLAME.2_INCH  [SFE_LOGO_FLAME_.2]  86.3,43.69 0 top
LOGO7  SFE_LOGO_NAME.2_INCH  [SFE_LOGO_NAME_.2]  82.74,38.61 0 bottom
LOGO8  SFE_LOGO_FLAME.2_INCH  [SFE_LOGO_FLAME_.2]  79.18,43.69 0 bottom
MEAS  JUMPER-COMBO_2_NC_TRACE  [COMBO-JUMPER_2_NC_TRACE]  54.8,62.74 0 bottom
MOSAIC_RST  JUMPER-COMBO_2_NO  [COMBO-JUMPER_2_NO]  100.52,56.39 270 bottom
PVT  JUMPER-SMT_2_NC_TRACE_SILK  [SMT-JUMPER_2_NC_TRACE_SILK]  29.4,18.92 180 bottom
PW+  JUMPER-COMBO_2_NC_TRACE  [COMBO-JUMPER_2_NC_TRACE]  16.7,90.68 90 bottom
PW-  JUMPER-COMBO_2_NC_TRACE  [COMBO-JUMPER_2_NC_TRACE]  14.16,90.68 90 bottom
PWR  JUMPER-SMT_2_NC_TRACE_SILK  [SMT-JUMPER_2_NC_TRACE_SILK]  16.7,16.38 0 bottom
Q1  [SC70-6]  122.11,32.26 180 top
R1  5.1k  [0603]  138.62,23.37 270 top
R2  5.1k  [0603]  131,23.37 270 top
R3  10k  [0603]  116.4,89.41 90 top
R4  10k  [0603]  124.65,32.26 90 top
R5  10k  [0603]  118.3,32.26 270 top
R6  1k  [0603]  42.1,97.16 0 top
R7  1k  [0603]  42.1,95.5 0 top
R8  49.9  [0603]  42.1,90.55 0 top
R9  49.9  [0603]  42.1,92.2 0 top
R10  49.9  [0603]  42.1,87.25 0 top
R11  13k  [0603]  137.35,80.52 180 top
R12  49.9  [0603]  42.1,88.9 0 top
R13  13k  [0603]  48.83,81.41 270 top
R14  13k  [0603]  47.18,81.41 270 top
R15  10k  [0603]  50.86,97.03 90 top
R16  10k  [0603]  136.08,64.77 180 top
R17  10k  [0603]  62.29,28.45 90 top
R18  10k  [0603]  97.98,100.2 90 top
R19  1k  [0603]  136.08,63.12 0 top
R20  4.7k  [0603]  43.88,81.41 270 top
R21  4.7k  [0603]  138.75,71.63 270 top
R22  10k  [0603]  49.21,97.03 270 top
R23  10k  [0603]  105.73,97.92 180 top
R24  13k  [0603]  137.35,78.87 180 top
R25  1k  [0603]  136.46,85.6 270 top
R26  1k  [0603]  139.76,85.6 270 top
R27  1k  [0603]  39.56,25.91 90 top
R28  470  [0603]  17.08,25.91 270 top
R29  10k  [0603]  146.49,71.63 270 top
R30  33  [0603]  142.05,71.63 90 top
R31  33  [0603]  140.4,71.63 90 top
R32  33  [0603]  143.7,71.63 90 top
R33  5.1k  [0603]  115.76,23.37 270 top
R34  5.1k  [0603]  108.14,23.37 270 top
R35  49.9  [0603]  149.67,85.6 270 top
R36  470  [0603]  18.73,25.91 270 top
R37  470  [0603]  30.67,25.91 270 top
R38  470  [0603]  29.02,25.91 270 top
R39  470  [0603]  27.37,25.91 270 top
R40  49.9  [0603]  148.02,85.6 270 top
R41  49.9  [0603]  144.72,85.6 270 top
R42  49.9  [0603]  146.37,85.6 270 top
R43  10k  [0603]  60.26,95.12 90 top
R44  10k  [0603]  62.04,95.12 90 top
R45  49.9 1/2W  [1206]  49.59,67.94 270 top
R46  10k  [0603]  58.99,28.45 90 top
R47  10k  [0603]  47.82,28.45 90 top
R48  10k  [0603]  136.08,61.47 0 top
R49  10k  [0603]  136.08,68.07 0 top
R50  10k  [0603]  110.68,62.74 180 top
R51  0  [0603]  136.08,66.42 0 top
R52  0  [0603]  136.08,59.82 0 top
R53  0  [0603]  68.39,93.22 0 top
R54  200k  [0603]  114.36,100.84 90 top
R55  4.7k  [0603]  52.51,97.03 270 top
R56  4.7k  [0603]  42.1,98.81 0 top
R57  4.7k  [0603]  138.11,85.6 270 top
R58  4.7k  [0603]  137.35,82.17 180 top
R59  470  [0603]  15.43,25.91 270 top
R_SCL  2.2k  [0603]  78.93,28.45 90 top
R_SCL_IO  2.2k  [0603]  115.25,97.92 180 top
R_SDA  2.2k  [0603]  86.55,28.45 90 top
R_SDA_IO  2.2k  [0603]  115.25,96.27 180 top
RDY  TEST-POINTPOGO_PTH  [1X01_NO_SILK]  86.55,62.74 90 top
RDY1  TEST-POINTPOGO_PTH  [1X01_NO_SILK]  105.6,86.87 0 top
REF  TEST-POINTPOGO_PTH  [1X01_NO_SILK]  86.55,99.57 90 top
RESET  MOMENTARY-SWITCH-SPST-PTH-RIGHT-ANGLE-8-020  [TACTILE_SWITCH_PTH_RA_8-020]  123.38,15.75 0 top
RESET_SW  JUMPER-SMT_2_NC_TRACE_SILK  [SMT-JUMPER_2_NC_TRACE_SILK]  123.38,20.83 270 bottom
RTK  JUMPER-SMT_2_NC_TRACE_SILK  [SMT-JUMPER_2_NC_TRACE_SILK]  29.4,21.46 180 bottom
RTS  TEST-POINTPOGO_PTH  [1X01_NO_SILK]  122.11,28.45 0 top
RX  TEST-POINTPOGO_PTH  [1X01_NO_SILK]  129.73,27.18 0 top
SCL2  TEST-POINTPOGO_PTH  [1X01_NO_SILK]  77.66,23.37 0 top
SDA2  TEST-POINTPOGO_PTH  [1X01_NO_SILK]  87.82,23.37 0 top
SHLD1  JUMPER-SMT_2_NC_TRACE_SILK  [SMT-JUMPER_2_NC_TRACE_SILK]  134.81,15.11 270 bottom
SHLD2  JUMPER-SMT_2_NC_TRACE_SILK  [SMT-JUMPER_2_NC_TRACE_SILK]  111.95,15.11 270 bottom
SPEED  JUMPER-SMT_2_NC_TRACE_SILK  [SMT-JUMPER_2_NC_TRACE_SILK]  149.03,110.36 0 bottom
SPEED2  JUMPER-SMT_2_NC_TRACE_SILK  [SMT-JUMPER_2_NC_TRACE_SILK]  27.11,110.36 180 bottom
T1  TRANSFORMER0508  [RFCMF1220100M4T]  111.95,28.45 270 top
TP_BOOT  TEST-POINTPOGO_PTH  [1X01_NO_SILK]  146.24,24.64 0 top
TX  TEST-POINTPOGO_PTH  [1X01_NO_SILK]  132.27,27.18 0 top
U1  ESP32-WROVER-IE  [ESP32-WROVER-E/IE]  123.38,71.63 90 top
U2  CH340C  [SO016]  133.54,32.26 0 top
U3  AP7361C-33FGEUDFN-8  [UDFN-8]  77.66,57.02 90 top
U4  [VSSOP_8PIN]  118.3,100.84 90 top
U6  AP7361C-33FGEUDFN-8  [UDFN-8]  77.66,51.94 90 top
U7  KSZ8041NLI  [MLF55Q-32LD]  143.7,77.98 270 top
U8  MOSAIC-X5X5  [MOSAIC_LGA]  86.55,81.79 270 top
U9  KSZ8041NLI  [MLF55Q-32LD]  48.45,90.68 0 top
U10  POE_PSU-DP990X  [DP990X]  25.59,75.44 90 top
U11  [VSSOP8_(SOT765-1)]  100.52,100.84 90 top
U12  URB2405YMD  [URB_YMD-15WR3]  33.21,48.77 0 top
U13  [VSSOP8_(SOT765-1)]  61.15,100.84 90 top
U14  [VSSOP8_(SOT765-1)]  53.53,100.84 90 top
U15  [VSSOP8_(SOT765-1)]  57.34,100.84 90 top
U16  [VSSOP8_(SOT765-1)]  104.33,100.84 90 top
U17  [VSSOP8_(SOT765-1)]  108.14,100.84 90 top
U18  [VSSOP8_(SOT765-1)]  111.95,100.84 90 top
U$2  [MOSAIC#X50]  71.06,108.97 90 top
U$3  [#SHLD#0]  112.59,15.11 0 bottom
U$4  [#RESET#0]  96.71,55.12 0 top
U$5  [PW#0]  12.26,88.52 90 top
U$6  [PW#1]  18.61,88.52 90 top
U$7  [##RESET##5]  124.14,20.83 0 bottom
U$8  [#I�C#0]  115.25,94.55 0 bottom
U$9  [MOSAIC_#RST#6]  99.89,57.79 0 top
U$10  [#LINK#1]  138.49,112.01 0 bottom
U$11  [#LOG#4]  30.16,16.38 0 bottom
U$12  [#PVT#2]  30.16,18.92 0 bottom
U$13  [#RTK#3]  30.16,21.46 0 bottom
U$14  [#BT#2]  15.94,21.46 0 bottom
U$15  [#BOOT#6]  147,20.83 0 bottom
U$16  [#_______________MOSAIC_X5_______________#8]  48.07,111 0 bottom
U$17  [#RX#2]  49.34,102.11 270 bottom
U$18  [#TX#3]  52.77,101.85 270 bottom
U$19  [#RTS#4]  56.32,101.22 270 bottom
U$20  [#CTS#5]  59.88,101.09 270 bottom
U$21  [ESP32_WIFI_#_BT0]  94.55,114.05 90 top
U$22  [#EVENT_A#6]  63.31,97.41 270 bottom
U$23  [#EVENT_B#7]  66.87,97.66 270 bottom
U$24  [VCCA0]  148.15,74.17 0 top
U$25  [#GND#0]  42.23,100.97 270 bottom
U$26  [#VCCIO#1]  45.78,99.31 270 bottom
U$27  [#VCCIO#1]  126.68,99.31 270 bottom
U$28  [#GND#0]  130.37,100.97 270 bottom
U$29  [#RTS#4]  112.71,101.09 270 bottom
U$30  [#CTS#5]  116.27,101.09 270 bottom
U$31  [#RX#2]  105.73,101.98 270 bottom
U$32  [#TX#3]  109.28,101.85 270 bottom
U$33  [#PPSO#11]  98.87,100.2 270 bottom
U$34  [#LOG_BTN#33]  102.17,97.54 270 bottom
U$35  [#SCL#10]  119.7,100.97 270 bottom
U$36  [#SDA#9]  123.25,100.71 270 bottom
U$37  [#MOSAIC#8]  96.71,111 0 bottom
U$38  [#___________________ESP32___________________#34]  104.84,111 0 bottom
U$39  [#3#3V#6]  123.89,95.76 0 top
U$40  [#5V#0]  134.68,95.76 0 top
U$41  [2V8220]  68.52,81.79 0 top
U$42  [2V8220]  63.94,81.79 0 bottom
U$43  [BOOT2]  149.16,26.16 0 top
U$44  [BOOT2]  143.32,26.16 0 bottom
U$45  [#SHLD#0]  135.45,15.11 0 bottom
U$46  [#I�C#0]  82.74,28.89 0 bottom
U$47  [COM2_CTS219]  108.39,77.98 0 bottom
U$48  [COM2_RTS219]  108.39,75.44 0 bottom
U$49  [COM2_RX219]  97.22,74.17 0 bottom
U$54  [COM2_TX219]  97.09,76.71 0 bottom
U$55  [RTS2231]  119.7,28.45 0 top
U$56  [DTR2232]  119.7,36.07 0 top
U$57  [COM3_CTS18]  96.2,84.33 0 bottom
U$58  [COM3_RTS18]  96.33,81.79 0 bottom
U$59  [3V3_SW25]  92.9,55.12 0 top
U$60  [3V325]  90.11,50.04 0 top
U$61  [5V25]  69.15,58.04 0 top
U$62  [MEAS2]  57.47,64.52 0 top
U$63  [VIN#0]  34.1,99.44 270 bottom
U$64  [COM3_RX219]  97.22,79.25 0 bottom
U$65  [COM3_TX18]  108.39,83.06 0 bottom
U$66  [GPIO17]  111.7,93.22 0 top
U$67  [GPIO17]  106.11,93.22 0 bottom
U$68  [GPIO218]  108.39,80.52 0 bottom
U$69  [RTK_MOSAIC#X50]  82.74,33.53 0 top
U$70  [VIN#0]  34.1,99.57 90 top
U$71  [VIN#1]  39.94,99.44 270 bottom
U$72  [VIN#1]  39.94,99.57 90 top
U$73  [MOSAIC_#RST#6]  89.47,57.79 0 bottom
U$74  [#RESET#0]  96.71,55.12 0 bottom
U$75  [RDY5]  86.42,62.74 0 top
U$76  [RTS2231]  119.57,28.45 0 bottom
U$77  [DTR2232]  119.57,36.07 0 bottom
U$78  [RDY5]  81.85,62.74 0 bottom
U$79  [REF219]  91.12,99.57 0 top
U$80  [REF219]  86.8,99.57 0 bottom
U$81  [V_POE0]  48.7,60.2 0 bottom
U$82  [V_USB3]  48.7,55.12 0 bottom
U$83  [V_USB24]  48.7,57.66 0 bottom
U$84  [MEAS2]  51.75,64.52 0 bottom
U$85  [VIN1]  48.83,52.58 0 bottom
U$86  [5V25]  65.6,58.04 0 bottom
U$87  [3V325]  85.66,50.04 0 bottom
U$88  [3V3_SW25]  85.66,55.12 0 bottom
U$89  [RX0]  129.6,27.18 0 top
U$90  [RX0]  126.05,27.18 0 bottom
U$91  [SCL3]  79.69,24.89 0 top
U$92  [SCL3]  75.5,24.89 0 bottom
U$93  [SDA4]  90.23,25.02 0 top
U$94  [SDA4]  85.66,25.02 0 bottom
U$95  [TX1]  136.21,27.18 0 top
U$96  [TX1]  132.52,27.18 0 bottom
U$97  [VDDA220]  59.63,77.98 0 top
U$98  [VDDA220]  53.78,77.98 0 bottom
U$99  [RTK_MOSAIC#X50]  82.74,33.53 0 bottom
U$100  [#VCCIO#1]  130.24,100.08 0 top
U$101  [1V80]  95.31,99.57 0 top
U$102  [1V80]  93.15,98.04 0 bottom
U$103  [#PWR#0]  15.94,16.38 0 bottom
U$104  [#WIFI#1]  15.94,18.92 0 bottom
U$105  [360]  111.57,72.9 0 bottom
U$106  [39361]  111.57,70.36 0 bottom
U$107  [VCCA0]  148.02,74.17 0 bottom
U$108  [GND39362]  105.35,71.63 0 bottom
U$109  [3V339362]  112.84,85.6 0 bottom
U$110  [3V339362]  105.35,86.87 0 bottom
U$113  [PW#0]  12.26,92.84 270 bottom
U$114  [PW#1]  18.61,92.96 270 bottom
U$116  [#_LOG_#5]  39.56,20.83 0 top
U$117  [#_#RESET#_#0]  123.38,20.83 0 top
U$118  [#_BOOT_#1]  146.24,20.83 0 top
U$119  [#MOSAIC#8]  105.6,19.56 90 top
U$120  [#LINK#1]  16.45,112.01 0 bottom
U$121  [#SPEED#0]  27.24,112.01 0 bottom
U$122  [#SPEED#0]  149.03,112.01 0 bottom
U$135  [GND12]  53.4,45.47 0 bottom
U$136  [POE_LOAD0]  38.29,62.74 0 top
U$143  [GND12]  53.53,45.47 0 top
U$146  [HIGH_TEMP_WARNING]  49.72,74.17 0 top
U$147  [HIGH_TEMP_WARNING]  39.05,75.82 0 top
U$152  [RTK5#SVG0]  97.98,36.83 0 top
U$153  [RTK5#SVG0]  67.5,36.96 0 bottom
VCCA  TEST-POINTPOGO_PTH  [1X01_NO_SILK]  151.32,74.17 0 top
VCCIO  [SWITCH_DPDT_SMD_AYZ0202]  127.19,95.76 0 top
VDDA  TEST-POINTPOGO_PTH  [1X01_NO_SILK]  53.53,77.98 0 top
VIN  TEST-POINTPOGO_PTH  [1X01_NO_SILK]  48.45,52.58 0 top
VIN+  JUMPER-COMBO_2_NC_TRACE  [COMBO-JUMPER_2_NC_TRACE]  35.75,99.57 90 bottom
VIN-  JUMPER-COMBO_2_NC_TRACE  [COMBO-JUMPER_2_NC_TRACE]  38.29,99.57 270 bottom
VPOE  TEST-POINTPOGO_PTH  [1X01_NO_SILK]  48.45,60.2 0 top
VUSB  TEST-POINTPOGO_PTH  [1X01_NO_SILK]  48.45,55.12 0 top
VUSB2  TEST-POINTPOGO_PTH  [1X01_NO_SILK]  48.45,57.66 0 top
WIFI  JUMPER-SMT_2_NC_TRACE_SILK  [SMT-JUMPER_2_NC_TRACE_SILK]  16.7,18.92 0 bottom

## Library data of the parts
1V8 2V8 3V3 3V3_SW 5V ANT2 COM2_CTS COM2_RTS COM2_RX COM2_TX COM3_CTS COM3_RTS COM3_RX COM3_TX DTR ESP1 ESP2 ESP36 ESP39 GND GPIO_1 GPIO_2 RDY RDY1 REF RTS RX SCL2 SDA2 TP_BOOT TX VCCA VDDA VIN VPOE VUSB VUSB2 = SparkFun-Connectors
ANT1 = SparkFun-RF; PROD_ID: CONN-08289
BOOT LOG_BTN RESET = SparkFun-Switches; PROD_ID: SWCH-13896
BOOT_SW BT I2C I2C_IO LINK LINK2 LOAD LOG MEAS MOSAIC_RST PVT PW+ PW- PWR RESET_SW RTK SHLD1 SHLD2 SPEED SPEED2 VIN+ VIN- WIFI = SparkFun-Jumpers
C1 C3 C6 C8-C10 C14 C18 C33 C36 C46 C56 C60 C61 = SparkFun-Capacitors; PROD_ID: CAP-07888
C2 C5 C7 C13 C15 C17 C19 C21-C23 C26-C31 C35 C37 C38 C41 C43 C44 C52 C53 C58 C59 C62 C63 = SparkFun-Capacitors; PROD_ID: CAP-08604
C4 = SparkFun-Capacitors; PROD_ID: CAP-00867
C11 C20 C24 C32 C39 C45 C54 C55 = SparkFun-Capacitors; PROD_ID: CAP-11015
C12 = SparkFun-Capacitors
C16 C48 C57 = SparkFun-Capacitors; PROD_ID: CAP-12547
C25 C42 = SparkFun-Capacitors; PROD_ID: CAP-16238
C34 C40 = SparkFun-Capacitors; PROD_ID: CAP-07883
C47 C49-C51 C84 C85 = SparkFun-Capacitors; PROD_ID: CAP-14259
C86 = SparkFun-Capacitors; PROD_ID: CAP-10547
D1 D7 D8 D10 = SparkFun-DiscreteSemi; PROD_ID: IC-13538
D2 D3 D13 D15-D34 = SparkFun-DiscreteSemi; DIGIKEY_PART: PESD0402-140CT-ND; MOUSE_PART: 650-PESD0402-140; PROD_ID: DIO-15359
D4-D6 D9 = SparkFun-DiscreteSemi; PROD_ID: DIO-14072
D11 D12 = CBI_LED_TRIPLE-3MM; PROD_ID: DIO-19990
D14 = SparkFun-DiscreteSemi; PROD_ID: DIO-09886
E$1-E$4 FD1-FD4 LOGO2 LOGO4-LOGO8 U$146 U$147 = SparkFun-Aesthetics
E$5 E$6 = SparkFun-Retired
ESP32_RF = SparkFun-RF; PROD_ID: CONN-00827
F1 = SparkFun-Fuses; PROD_ID: RES-14313
FB1-FB3 = SparkFun-Coils; PROD_ID: NDUC-12579
H1-H8 H10 = SparkFun-Hardware
J1 J6 = SparkFun-Connectors; PROD_ID: CONN-14122
J2 J9 = SparkFun-Connectors; PROD_ID: CONN-16253
J3 = SparkFun-Connectors; PROD_ID: CONN-16110
J4 = SparkFun-Connectors; PROD_ID: CONN-14483
J5 J13 = SparkFun-Connectors; PROD_ID: CONN-17279; STOREFRONT: PRT-21328
J8 = SparkFun-Connectors; PROD_ID: CONN-09193
L1 L4 = SparkFun-Coils; PROD_ID: NDUC-14234
L2 L3 = SparkFun-Coils
Q1 = SparkFun-DiscreteSemi; PROD_ID: TRANS-13337
R1 R2 R33 R34 = SparkFun-Resistors; PROD_ID: RES-12083
R3-R5 R15-R18 R22 R23 R29 R43 R44 R46-R50 = SparkFun-Resistors; PROD_ID: RES-00824
R6 R7 R19 R25-R27 = SparkFun-Resistors; PROD_ID: RES-07856
R8-R10 R12 R35 R40-R42 = SparkFun-Resistors; PROD_ID: RES-16237
R11 R13 R14 R24 = SparkFun-Resistors; PROD_ID: RES-14017
R20 R21 R55-R58 = SparkFun-Resistors; PROD_ID: RES-07857
R28 R36-R39 R59 = SparkFun-Resistors; PROD_ID: RES-07869
R30-R32 = SparkFun-Resistors; PROD_ID: RES-08270
R45 = SparkFun-Resistors; PROD_ID: RES-16252
R51-R53 = SparkFun-Resistors; PROD_ID: RES-08609
R54 = SparkFun-Resistors; PROD_ID: RES-09385
R_SCL R_SCL_IO R_SDA R_SDA_IO = SparkFun-Resistors; PROD_ID: RES-08272
T1 = SparkFun-Coils; PROD_ID: COMP-19495
U1 = SparkFun-RF; PROD_ID: IC-19265
U2 = SparkFun-IC-Comms; PROD_ID: IC-14038
U3 U6 = SparkFun-IC-Power; PROD_ID: VREG-14094
U4 = SparkFun-IC-Comms; PROD_ID: IC-14450
U7 U9 = Septentrio_mosaic-X5; PROD_ID: IC-19428
U8 = Septentrio_mosaic-X5; PROD_ID: GPS-19395
U10 = SparkFun-IC-Power; PROD_ID: IC-16251
U11 U13-U18 = 74LVC2T45DC; PROD_ID: IC-19989
U12 = SparkFun-IC-Power; PROD_ID: COMP-19263
U$2-U$49 U$54-U$110 U$113 U$114 U$116-U$122 U$135 U$136 U$143 U$152 U$153 = output
VCCIO = SparkFun-Switches; PROD_ID: SWCH-08179; SF_ID: COM-00597

## Nets
1.8V: 1V8.1 C60.1 C62.1 R18.2 U8.AC4 U11.1 U11.5 U13.1
2V8: 2V8.1 U8.M23 U8.N23
3.3V: 3V3.1 C1.1 C2.1 C3.1 C4.1 C14.1 C15.1 C21.1 C32.1 C41.1 C56.1 ESP2.1 FB2.1 I2C.2 J4.2 J9.11 J9.13 R3.2 R16.2 R21.2 R29.2 R49.2 R57.1 R58.1 R59.1 U1.2 U2.4 U2.16 U4.P2 U6.1 U7.17 U17.1 U17.5 U18.1 VCCIO.1
3.3V_SW: 3V3_SW.1 C5.1 C6.1 C7.1 C11.1 C18.1 C19.1 C20.1 C46.1 C53.1 C54.1 C58.1 C63.1 D34.1 FB1.1 J2.11 J2.13 J3.4 R15.2 R17.2 R20.2 R46.2 R47.2 R55.1 R56.1 RDY1.1 U3.1 U8.A18 U8.A19 U8.A20 U8.B8 U8.B18 U8.B19 U8.B20 U8.C18 U8.C19 U8.C20 U9.17 U14.1 U14.5 U15.1 U16.1
5V: 5V.1 C8.1 C9.1 C10.1 C17.1 C57.+ C61.1 F1.1 FB3.1 U3.5 U3.8 U6.5 U6.8 U8.A8 VCCIO.3
5V_RAW: C48.+ C49.1 C50.1 L1.1 U10.1 U10.2
5V_RAW1: C16.+ C51.1 C84.1 L4.1 U12.4
!BOOT!: BOOT_SW.1 Q1.6 R16.1 R19.2 TP_BOOT.1
!RESET!: C31.1 MOSAIC_RST.2 MOSAIC_RST.4 Q1.3 R3.1 RESET_SW.1 U1.3
ANT1: ANT1.SIG D17.1 L3.2 U8.AC20
ANT2: ANT2.FEED D2.1 L2.1 R53.2 U8.V23
CH340-DTR: DTR.1 Q1.1 R4.2 U2.13
CH340-RTS: Q1.4 R5.2 RTS.1 U2.14
CH340-RXI: TX.1 U1.35 U2.3
CH340-TXO: RX.1 U1.34 U2.2
COM2_CTS: COM2_CTS.1 U8.J1
COM2_RTS: COM2_RTS.1 U8.G1
COM2_RX: COM2_RX.1 U8.F1
COM2_TX: COM2_TX.1 U8.H1
COM3_CTS: COM3_CTS.1 U8.N1
COM3_RTS: COM3_RTS.1 U8.L1
COM3_RX: COM3_RX.1 U8.K1
COM3_TX: COM3_TX.1 U8.M1
COM4_RX: R52.2 U8.D3
COM4_TX: R51.2 U8.E3
D+_ESP32: D10.1 J1.A6 J1.B6 U2.5
D+_MOSAIC: D8.1 J6.A6 J6.B6 T1.A2
D+_MOSAIC_T: T1.A1 U8.A5
D-_ESP32: D10.3 J1.A7 J1.B7 U2.6
D-_MOSAIC: D8.3 J6.A7 J6.B7 T1.B2
D-_MOSAIC_T: T1.B1 U8.A6
ESP2_TX: R48.1 R52.1 U1.24
ESP4_RX: R51.1 U1.26
ESP5_ERST: R49.1 U1.29 U7.32
ESP12_LED_WIFI: R28.1 R50.1 U1.14
ESP14_SCL: J4.4 R_SCL.1 SCL2.1 U1.13 U4.P3
ESP14_SCL_IO: D26.1 J13.4 R_SCL_IO.1 U4.P6
ESP15_LED_BT: R36.1 U1.16
ESP15_SDA: J4.3 R_SDA.1 SDA2.1 U1.23 U4.P4
ESP15_SDA_IO: D25.1 J13.3 R_SDA_IO.1 U4.P5
ESP18_MDIO: R21.1 U1.30 U7.11
ESP19_TXD0: U1.31 U7.24
ESP21_TXEN: U1.33 U7.23
ESP22_TXD1: U1.36 U7.25
ESP23_MDC: U1.37 U7.12
ESP25_RXD0: R30.1 U1.10
ESP26_RXD1: R31.1 U1.11
ESP27_CRSDV: R32.1 U1.12
ESP32_RF: D3.1 ESP32_RF.SIG J8.FEED
ESP32_TX: U1.8 U17.2
ESP32_TX_O: D24.1 J13.7 U17.7
ESP33_RTS: U1.9 U17.3
ESP33_RTS_O: D23.1 J13.6 U17.6
ESP34_RX: U1.6 U18.2
ESP34_RX_I: D28.1 J13.8 U18.7
ESP35_CTS: U1.7 U18.3
ESP35_CTS_I: D27.1 J13.5 U18.6
ESP36: ESP36.1 U1.4
ESP39: ESP39.1 U1.5
ESP_REFCLK: R19.1 U1.25 U7.9
ETHER_!RST!: R22.2 U8.F2 U9.32
ETHER_CLK: U8.AA2 U9.9
ETHER_CRSDV: U8.N2 U9.18
ETHER_MDC: U8.V2 U9.12
ETHER_MDIO: R20.1 U8.W2 U9.11
ETHER_RXD0: U8.R2 U9.16
ETHER_RXD1: U8.T2 U9.15
ETHER_RXER: U8.M2 U9.20
ETHER_TXD0: U8.J2 U9.24
ETHER_TXD1: U8.H2 U9.25
ETHER_TXEN: U8.L2 U9.23
GND: ANT1.GND@0 ANT1.GND@1 ANT1.GND@2 ANT1.GND@3 ANT2.1 ANT2.2 BOOT.1 C1.2 C2.2 C3.2 C4.2 C5.2 C6.2 C7.2 C8.2 C9.2 C10.2 C11.2 C12.2 C13.2 C14.2 C15.2 C16.- C17.2 C18.2 C19.2 C20.2 C21.2 C22.2 C23.2 C24.2 C25.2 C26.2 C27.2 C28.2 C29.2 C30.2 C31.2 C32.2 C33.2 C34.2 C35.2 C36.2 C37.2 C38.2 C39.2 C40.2 C41.2 C42.2 C43.2 C44.2 C45.2 C46.2 C47.2 C48.- C49.2 C50.2 C51.2 C52.2 C53.2 C54.2 C55.2 C56.2 C57.- C58.2 C59.2 C60.2 C61.2 C62.2 C63.2 C84.2 C85.2 D1.2 D2.2 D3.2 D7.2 D8.2 D10.2 D11.CATHODE_1 D11.CATHODE_2 D11.CATHODE_3 D12.CATHODE_1 D12.CATHODE_2 D12.CATHODE_3 D13.2 D15.2 D16.2 D17.2 D18.2 D19.2 D20.2 D21.2 D22.2 D23.2 D24.2 D25.2 D26.2 D27.2 D28.2 D29.2 D30.2 D31.2 D32.2 D33.2 D34.2 ESP1.1 ESP32_RF.GND@0 ESP32_RF.GND@1 ESP32_RF.GND@2 ESP32_RF.GND@3 GND.1 J1.GND J1.GND2 J3.6 J3.10 J3.11 J3.12 J3.13 J4.1 J5.8 J6.GND J6.GND2 J8.1 J8.2 J13.1 LOG_BTN.1 R1.1 R2.1 R11.2 R13.2 R14.2 R22.1 R24.2 R33.1 R34.1 R43.1 R44.1 R45.1 R48.2 R50.2 R53.1 RESET.1 SHLD1.1 SHLD2.1 U1.1 U1.15 U1.38 U1.GND U1.GNDT1 U1.GNDT2 U1.GNDT3 U1.GNDT4 U1.GNDT5 U1.GNDT6 U1.GNDT7 U1.GNDT8 U2.1 U3.4 U3.EP U4.P1 U6.4 U6.EP U7.1 U7.GND U8.A3 U8.A4 U8.A7 U8.A15 U8.A16 U8.A17 U8.A21 U8.A22 U8.A23 U8.AA13 U8.AA14 U8.AA15 U8.AA16 U8.AA17 U8.AA18 U8.AA19 U8.AA20 U8.AA21 U8.AA22 U8.AA23 U8.AB2 U8.AB3 U8.AB4 U8.AB5 U8.AB6 U8.AB7 U8.AB8 U8.AB13 U8.AB14 U8.AB15 U8.AB16 U8.AB17 U8.AB18 U8.AB19 U8.AB20 U8.AB21 U8.AB22 U8.AB23 U8.AC13 U8.AC15 U8.AC18 U8.AC19 U8.AC21 U8.AC22 U8.AC23 U8.B4 U8.B5 U8.B6 U8.B7 U8.B13 U8.B17 U8.B21 U8.C4 U8.C7 U8.C15 U8.C16 U8.C17 U8.C23 U8.D2 U8.D21 U8.D22 U8.D23 U8.E2 U8.E21 U8.E22 U8.E23 U8.F21 U8.F22 U8.F23 U8.G2 U8.G21 U8.G23 U8.H21 U8.H22 U8.H23 U8.J21 U8.J22 U8.J23 U8.K2 U8.K21 U8.K22 U8.K23 U8.L21 U8.L22 U8.L23 U8.M21 U8.M22 U8.N21 U8.N22 U8.P1 U8.P2 U8.P3 U8.P21 U8.P22 U8.R3 U8.R21 U8.R22 U8.T21 U8.T22 U8.T23 U8.U2 U8.U21 U8.U22 U8.U23 U8.V21 U8.V22 U8.W21 U8.W22 U8.W23 U8.Y2 U8.Y21 U8.Y22 U8.Y23 U9.1 U9.GND U10.3 U11.3 U11.4 U12.6 U13.4 U13.5 U14.4 U15.4 U15.5 U16.4 U16.5 U16.6 U17.4 U18.4 U18.5
GND-ISO: C25.1 C42.1 J2.7 J2.8 J2.S1 J2.S2 J9.7 J9.8 J9.S1 J9.S2
GPIO_1: GPIO_1.1 U8.AA4
GPIO_2: GPIO_2.1 U8.L3
LED_PVT: R38.1 U8.A14
LED_RTK: R39.1 U8.M3
LINK_ESP32: R25.2 R58.2 U7.30
LINK_MOSAIC: R6.2 R56.2 U9.30
LOG_LED: R37.1 U8.B2
MEAS: D4.C D5.C D6.C D9.C MEAS.2 MEAS.4
MOSAIC_!RST!: MOSAIC_RST.1 MOSAIC_RST.3 U8.A11
MOSAIC_CTS: U8.E1 U15.3
MOSAIC_CTS_I: D19.1 J5.3 U15.6
MOSAIC_EVENTA_1V8: U8.AC6 U13.2
MOSAIC_EVENTA_I: D15.1 J5.2 R43.2 U13.7
MOSAIC_EVENTB_1V8: U8.AC7 U13.3
MOSAIC_EVENTB_I: D13.1 J5.1 R44.2 U13.6
MOSAIC_LOG_BTN: U8.K3 U16.2
MOSAIC_LOG_BTN_I: D18.1 J13.9 R23.2 R27.2 U16.7
MOSAIC_PPSO: D16.1 J13.10 U11.7
MOSAIC_PPSO_1V8: U8.AC8 U11.2
MOSAIC_RTS: U8.C1 U14.3
MOSAIC_RTS_O: D21.1 J5.4 U14.6
MOSAIC_RX: U8.B1 U15.2
MOSAIC_RX_I: D20.1 J5.6 U15.7
MOSAIC_TX: U8.D1 U14.2
MOSAIC_TX_O: D22.1 J5.5 U14.7
N$1: J1.B5 R1.2
N$2: J1.A5 R2.2
N$3: J9.14 LINK.1
N$4: Q1.2 R5.1
N$5: Q1.5 R4.1
N$6: C37.1 R54.1 U4.P7 U4.P8
N$7: J9.12 SPEED.1
N$8: J6.SHLD1 J6.SHLD2 J6.SHLD3 J6.SHLD4 SHLD2.2
N$9: R18.1 U8.AC3
N$10: F1.2 MEAS.1 MEAS.3
N$11: LOG_BTN.2 R27.1
N$12: R26.1 SPEED.2
N$13: C12.1 L2.2 L3.1
N$14: I2C.3 R_SCL.2
N$15: I2C.1 R_SDA.2
N$16: LOG.2 R37.2
N$17: D12.ANODE_3 LOG.1
N$18: D11.ANODE_2 WIFI.1
N$19: C27.1 R35.2 R40.2
N$20: C28.1 R41.2 R42.2
N$21: LINK.2 R25.1
N$22: BT.1 D11.ANODE_1
N$23: C23.1 C33.1 U7.2
N$24: C34.1 R11.1 R24.1 U7.10
N$25: R29.1 U7.28
N$26: BT.2 R36.2
N$27: LOAD.1 R45.2
N$28: RESET.2 RESET_SW.2
N$29: BOOT.2 BOOT_SW.2
N$30: R30.2 U7.16
N$31: R31.2 U7.15
N$32: R28.2 WIFI.2
N$33: J6.B5 R33.2
N$34: J6.A5 R34.2
N$35: D12.ANODE_2 PVT.1
N$36: D12.ANODE_1 RTK.1
N$37: R39.2 RTK.2
N$38: PVT.2 R38.2
N$39: R32.2 U7.18
N$40: J2.14 LINK2.1
N$41: J2.12 SPEED2.1
N$42: I2C_IO.3 R_SCL_IO.2
N$43: I2C_IO.1 R_SDA_IO.2
N$44: PWR.2 R59.2
N$45: D11.ANODE_3 PWR.1
N$142: R7.1 SPEED2.2
N$143: LINK2.2 R6.1
N$144: C29.1 R8.2 R9.2
N$145: C30.1 R10.2 R12.2
N$146: C35.1 C36.1 U9.2
N$147: C40.1 R13.1 R14.1 U9.10
N$148: R15.1 U9.28
PW1+: PW+.1 PW+.3 U10.5 U10.6
PW1-: PW-.1 PW-.3 U10.7 U10.8
PW+: J2.9 PW+.2 PW+.4
PW-: J2.10 PW-.2 PW-.4
RD+_ESP32: D7.4 J9.3 R42.1 U7.5
RD+_MOSAIC: D1.1 J2.3 R12.1 U9.5
RD-_ESP32: D7.6 J9.6 R41.1 U7.4
RD-_MOSAIC: D1.3 J2.6 R10.1 U9.4
RDY: RDY.1 U8.A12
REF: REF.1 U8.AC16 U8.AC17
SD_CLK: D32.1 J3.5 U8.AA1
SD_CMD: D33.1 J3.3 R46.1 U8.AB1
SD_DAT3: J3.2 R17.1
SD_DATA: D31.1 J3.7 R47.1 U8.Y1
SHIELD: J1.SHLD1 J1.SHLD2 J1.SHLD3 J1.SHLD4 SHLD1.2
SPEED_ESP32: R26.2 R57.2 U7.31
SPEED_MOSAIC: R7.2 R55.2 U9.31
TD+_ESP32: D7.3 J9.1 R35.1 U7.7
TD+_MOSAIC: D1.6 J2.1 R8.1 U9.7
TD-_ESP32: D7.1 J9.2 R40.1 U7.6
TD-_MOSAIC: D1.4 J2.2 R9.1 U9.6
V_POE: C47.1 D9.A L1.2 LOAD.2 VPOE.1
V_USB: D5.A D10.5 J1.VBUS1 J1.VBUS2 VUSB.1
V_USB_2: D6.A D8.5 J6.VBUS1 J6.VBUS2 VUSB2.1
VANT: FB3.2 U8.P23 U8.R23
VCCA: C22.1 C38.1 C39.1 D7.5 FB2.2 J9.4 J9.5 U7.3 VCCA.1
VCCIO: C43.1 C44.1 C45.1 C52.1 C55.1 C59.1 D29.1 D30.1 I2C_IO.2 J5.7 J13.2 R23.1 R54.2 U11.8 U13.8 U14.8 U15.8 U16.8 U17.8 U18.8 VCCIO.2
VDDA: C13.1 C24.1 C26.1 D1.5 FB1.2 J2.4 J2.5 U9.3 VDDA.1
VIN: C85.1 D4.A L4.2 VIN.1
VIN1+: D14.A VIN+.1 VIN+.3
VIN1-: C86.- U12.2 VIN-.2 VIN-.4
VIN2+: C86.+ D14.C U12.3
VIN+: J5.10 VIN+.2 VIN+.4
VIN-: J5.9 VIN-.1 VIN-.3